# Altium PCB 1_SPDIF_PCB_V1x4.PcbDoc (part 1 of 2)
Units mm, origin at the board's own origin, x right, y up, seen from the top; angles counter-clockwise.
Board outline 60 x 60 mm, 4 copper layers (Top Layer, Mid-Top Layer, Mid-Bot Layer, Bottom Layer), stack 1.543 mm thick; 67 components, 68 nets, 241 pads, 109 vias.
Unrouted connection lines stored in the file: 1.
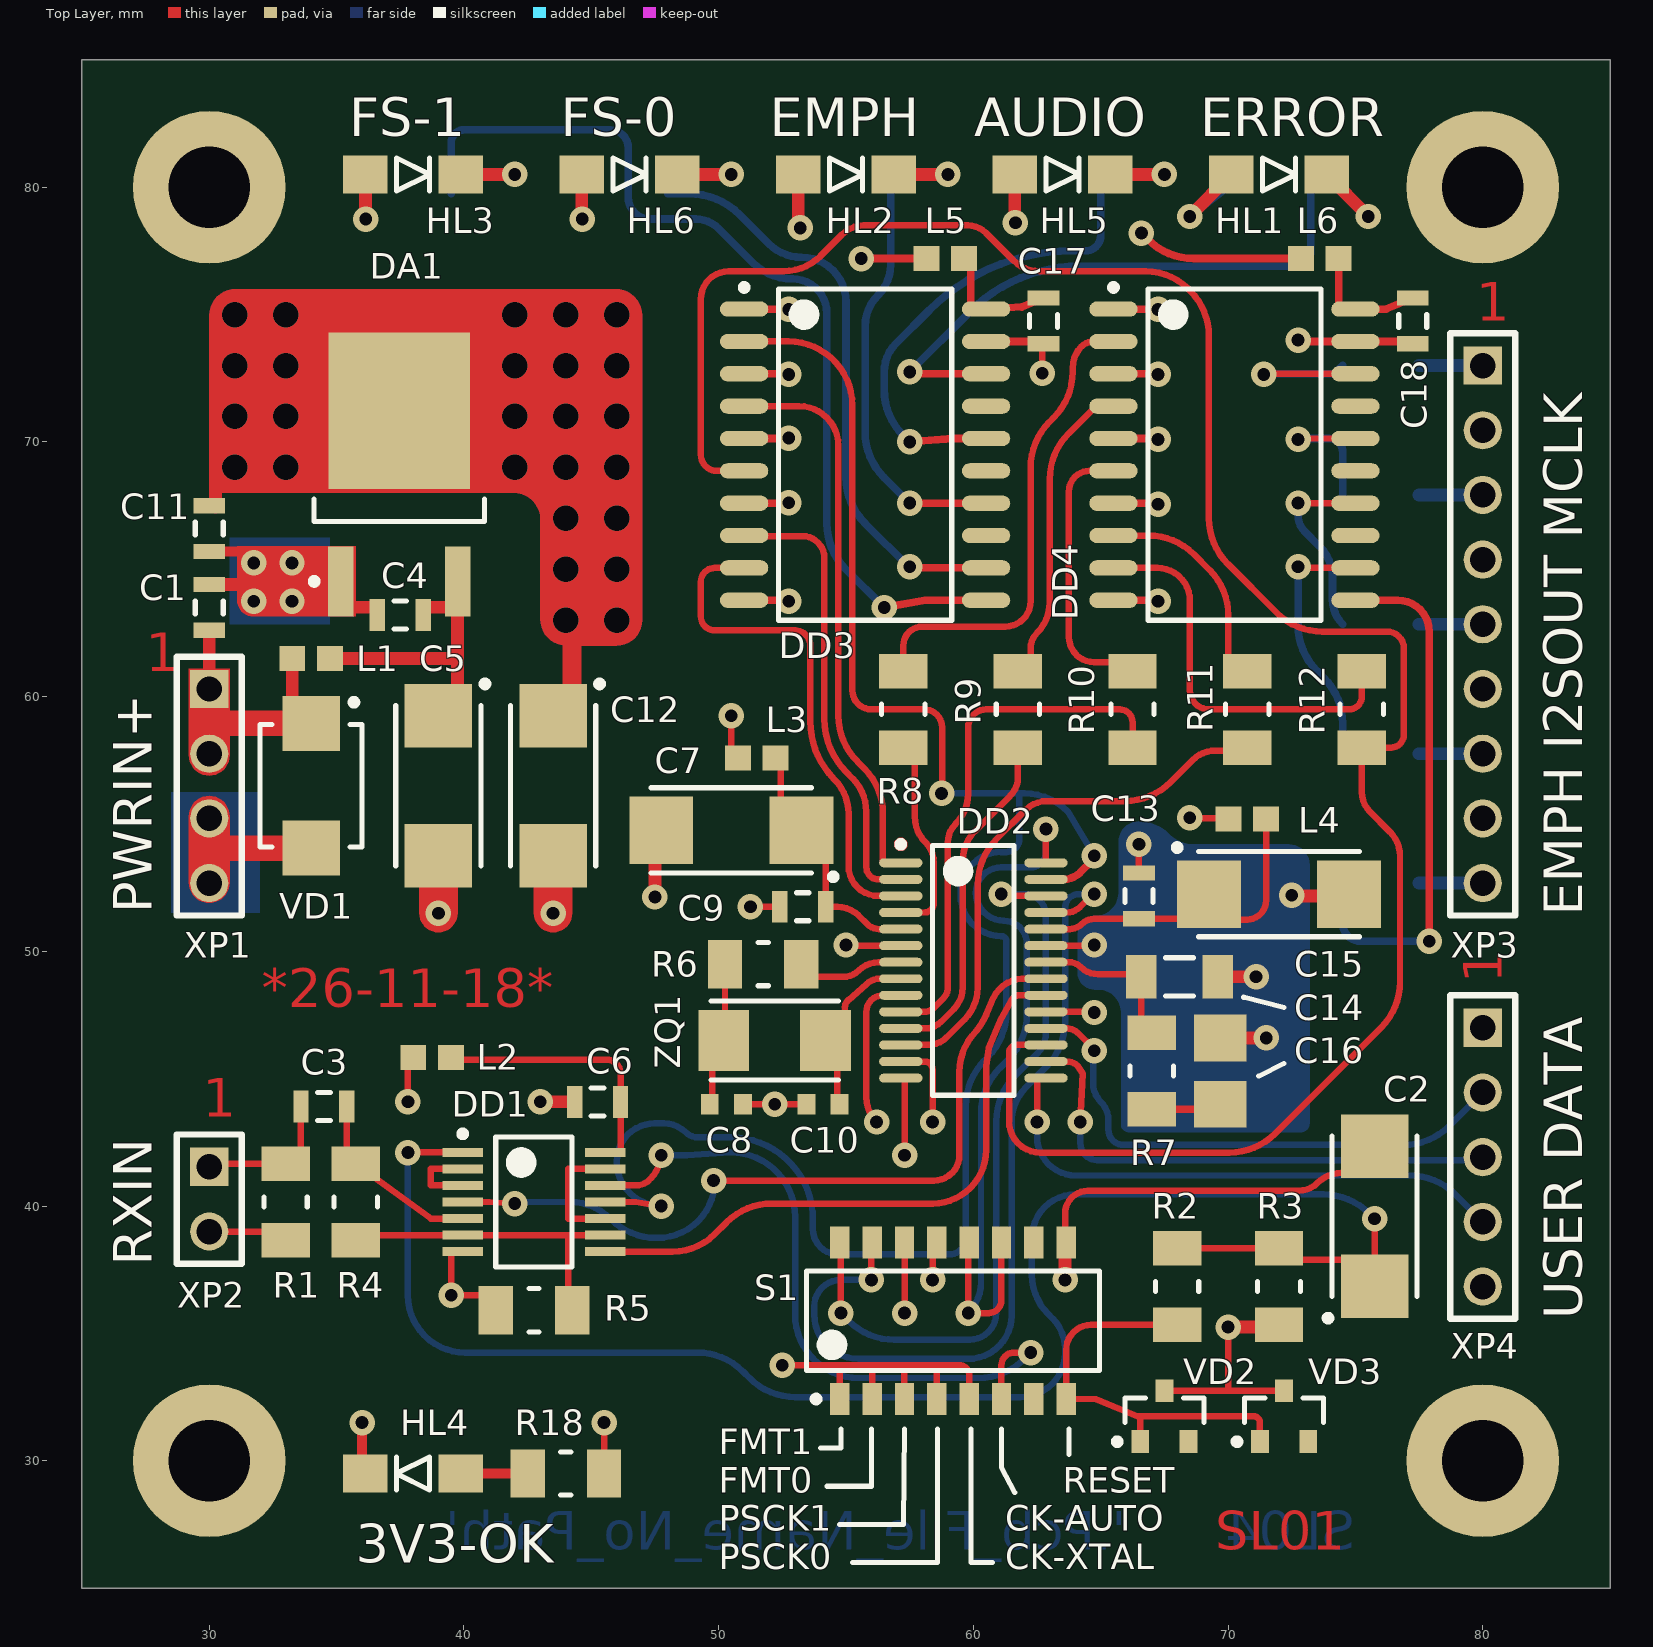
[diagram p0: Top Layer view]
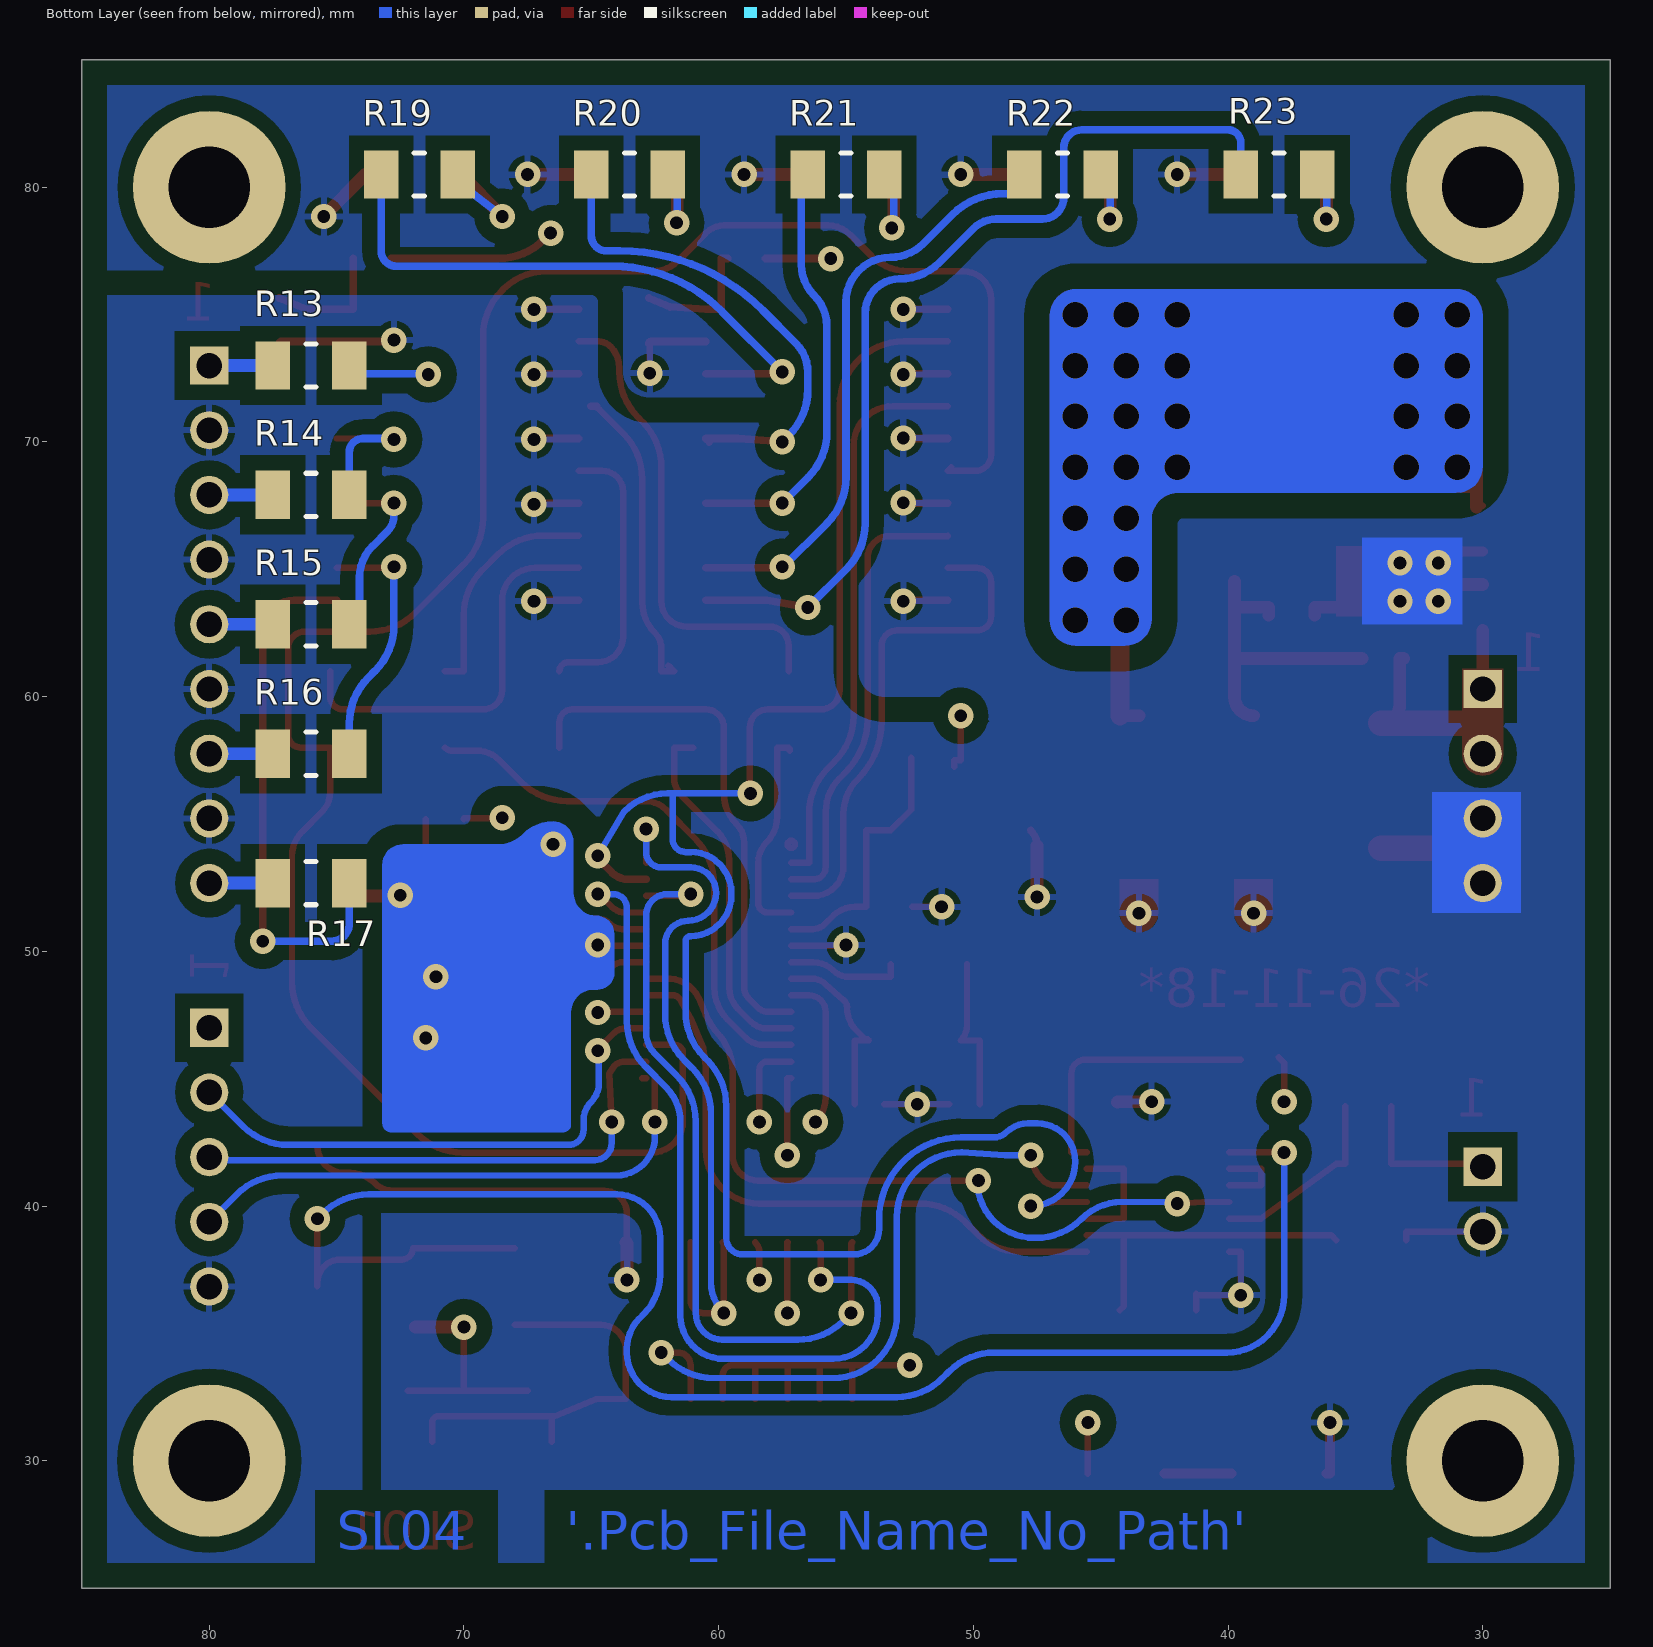
[diagram p1: Bottom Layer view, seen from below]
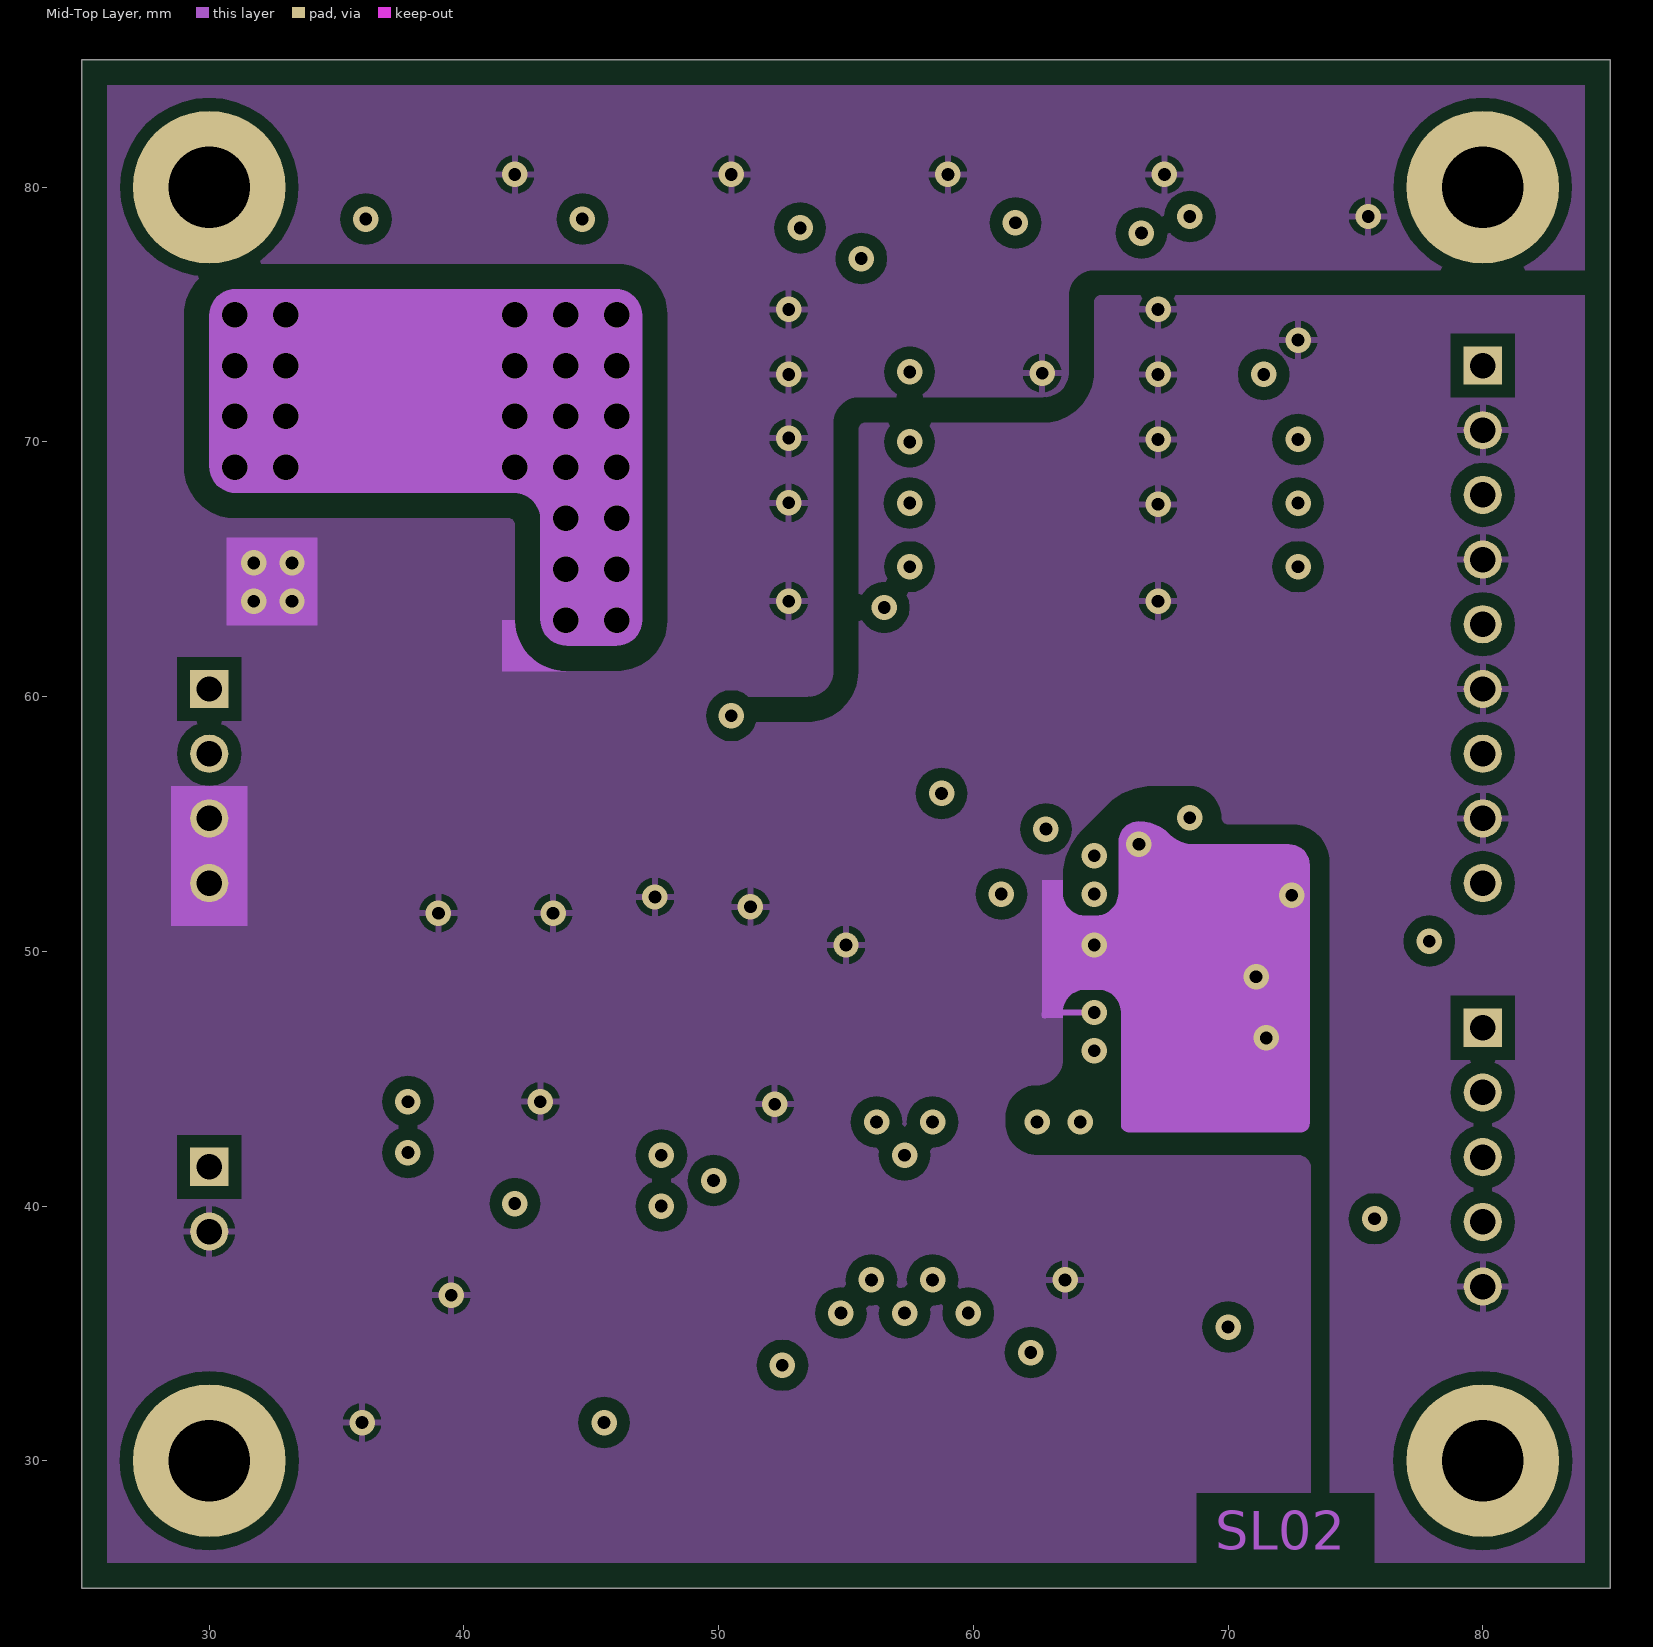
[diagram p2: Mid-Top Layer]
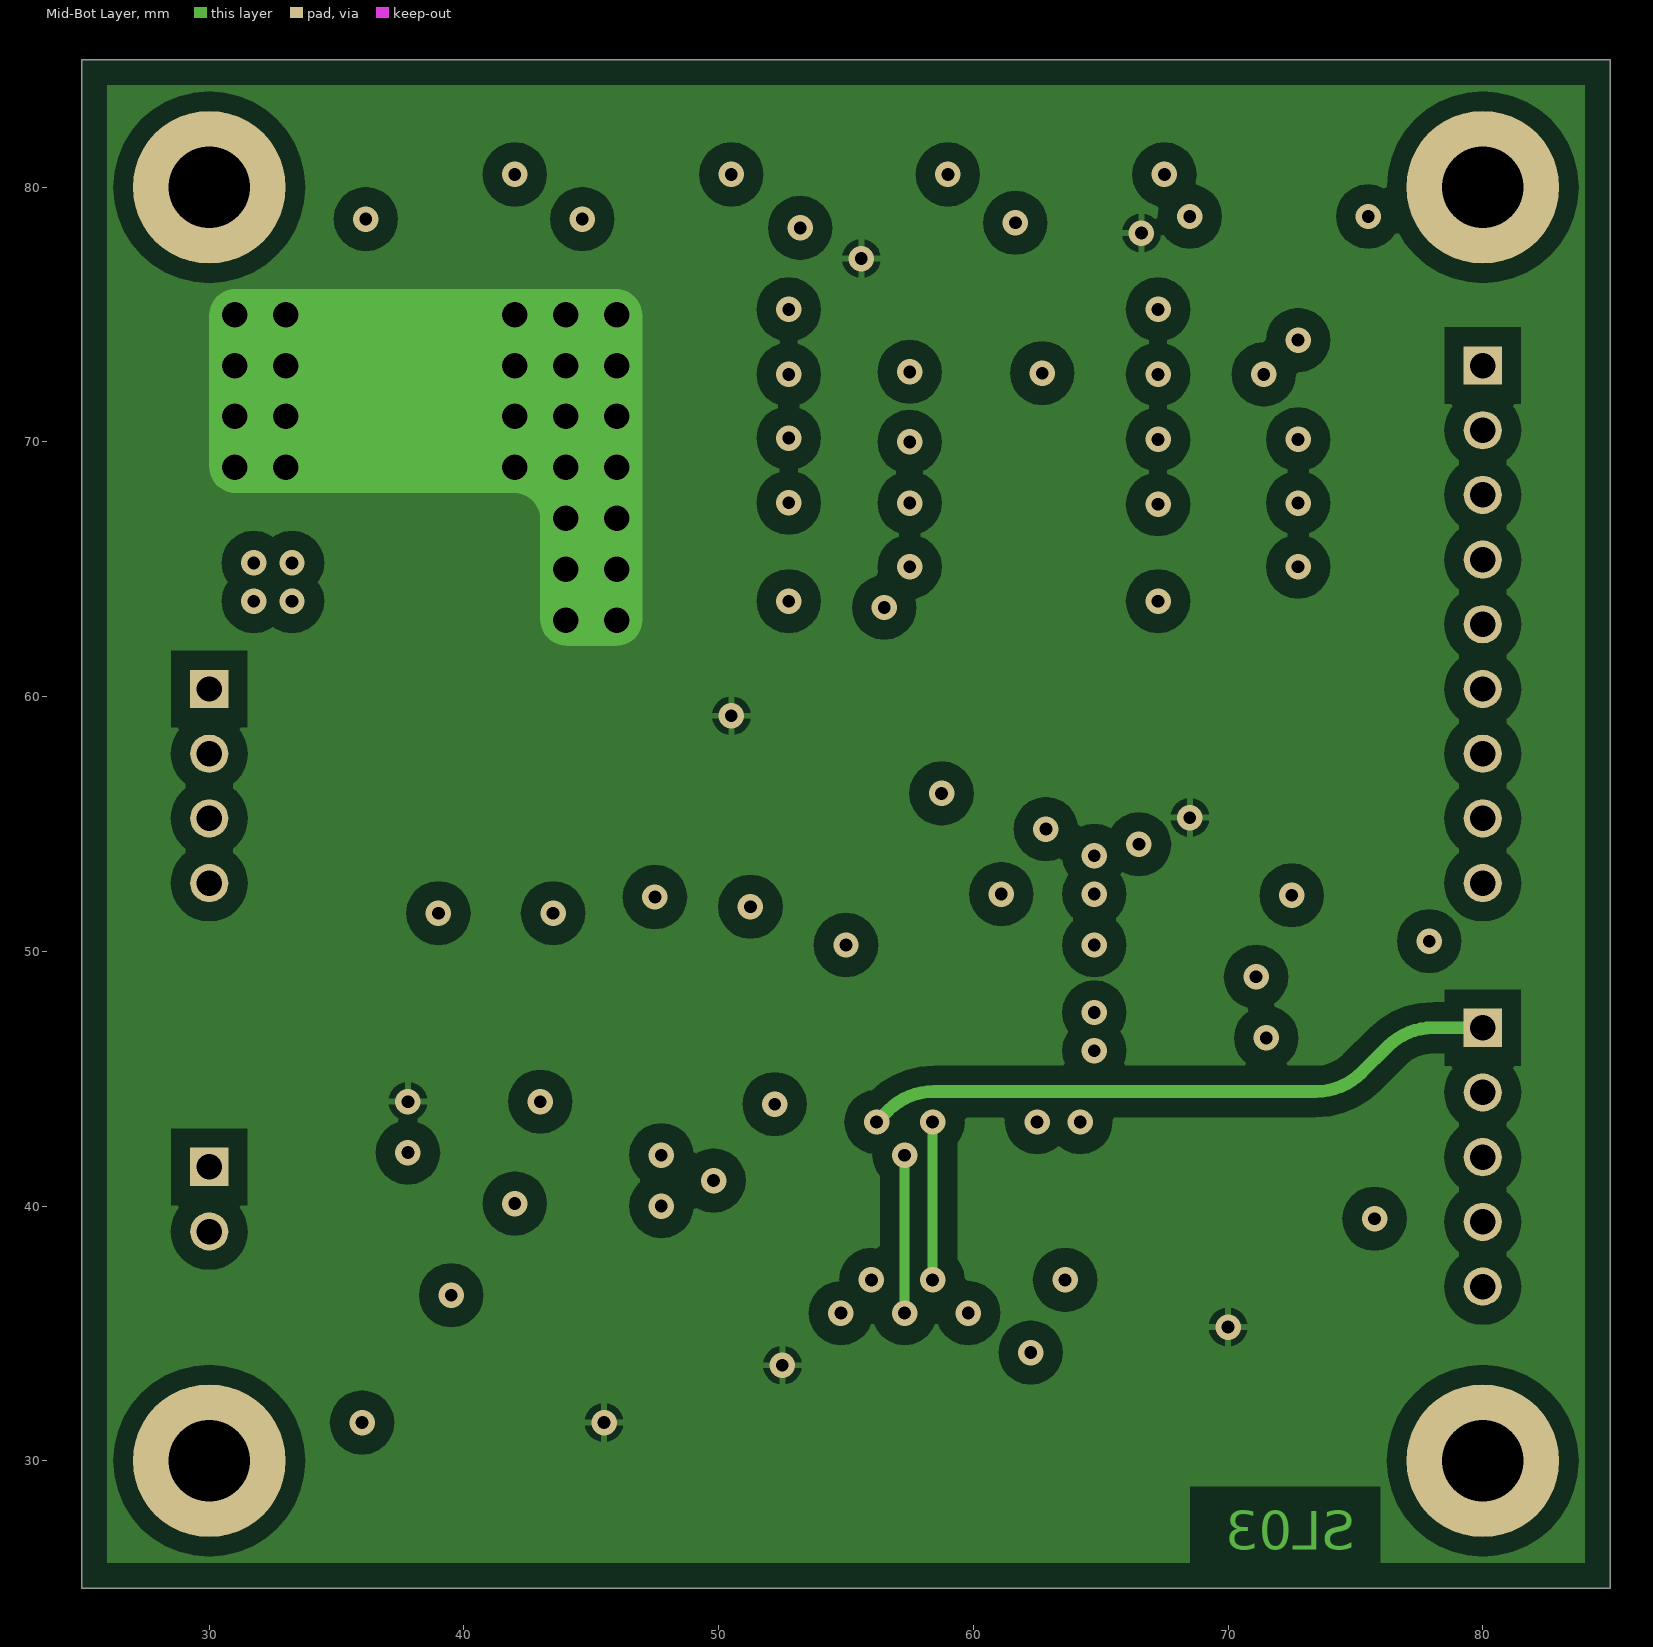
[diagram p3: Mid-Bot Layer]

## Layer stack, top to bottom
Top Solder: solder mask 0.0102, Solder Resist, Dk 3.5
Top Layer: signal copper 0.0356
Prepreg Top: prepreg 0.2, FR-4, Dk 4.2
Mid-Top Layer: signal copper 0.036
Core: core 1, Dk 4.2
Mid-Bot Layer: signal copper 0.036
Prepreg Bot: prepreg 0.2, Dk 4.2
Bottom Layer: signal copper 0.0356
Bottom Solder: solder mask 0.0102, Solder Resist, Dk 3.5

## Board outline
25,25 85,25 85,85 25,85

## Design rules (kind name [scope] priority, off if disabled: settings)
Clearance Clearance_MT_Poly [All vs (OnLayer('Mid-Top Layer') AND InPolygon)] p1: gap=0.5 ignorepadtopadclearanceinfootprint=FALSE
Clearance Clearance_Bot_Poly [All vs (OnLayer('Bottom Layer') AND InPolygon)] p2: gap=0.6 ignorepadtopadclearanceinfootprint=FALSE
Clearance Clearance_MB_Poly [All vs (OnLayer('Mid-Bot Layer') AND InPolygon)] p3: gap=0.75 ignorepadtopadclearanceinfootprint=FALSE
Clearance "Stitching No Net" [IsStitchingVia and InNet('No Net') vs (IsVia and (Not IsStitchingVia)) Or IsPad] p4: gap=0.254 ignorepadtopadclearanceinfootprint=FALSE
Clearance [All] p5: gap=0.254 ignorepadtopadclearanceinfootprint=FALSE except(0: Arc-Hole Track-Hole SMDPad-Hole THPad-Hole Via-Hole Fill-Hole Poly-Hole Region-Hole Text-Hole)
HoleSize [All] p1: absolutevalues=TRUE maxlimit=5 minlimit=0.025 maxpercent=80.000 minpercent=20.000
MinimumSolderMaskSliver [All] p1: minsoldermaskwidth=0.1
PolygonConnect [All] p1: connectstyle=Relief reliefconductorwidth=0.254 reliefentries=4 polygonreliefangle="90 Angle" airgapwidth=0.254
RoutingVias [All] p1: holewidth=0.5 width=1 viastyle="Through Hole" minholewidth=0.5 minwidth=0.9 maxholewidth=1 maxwidth=1.5
SilkToSilkClearance [All] p1: silktosilkclearance=0.2
SilkToSolderMaskClearance [IsPad] p1: minsilkscreentomaskgap=0.1 clearancetoexposedcopper=TRUE
SolderMaskExpansion [All] p1: expansion=0.07
Width [All] p1: maxlimit=1 minlimit=0.254 preferedwidth=0.5
26 further rules are at their usual default settings.

## Components (designator, comment, footprint, x,y, rotation, side; value= is the part's Value field where it differs from the comment)
C1 "Конденсатор" "GRM21B R1" 30,63.505 r270 top value=0.1u
C2 "Конд. полярный" К53-68-C 75.75,39.6 r90 top value=10u
C3 "Конденсатор" "GRM21B R1" 34.5,43.91 r0 top value=0.1u
C4 "Конденсатор" "GRM21B R1" 37.5,63.2 r0 top value=0.1u
C5 "Конд. полярный" К53-68-C 39,56.5 r270 top value=10u
C6 "Конденсатор" "GRM21B R1" 45.25,44.08 r180 top value=0.1u
C7 "Конд. полярный" К53-68-C 50.5,54.75 r180 top value=10u
C8 "Конденсатор" "GRM188 R1" 50.3,44 r180 top value=18p
C9 "Конденсатор" "GRM21B R1" 53.3,51.75 r180 top value=0.1u
C10 "Конденсатор" "GRM188 R1" 54.1,44 r0 top value=18p
C11 "Конденсатор" "GRM21B R1" 30,66.6 r90 top value=0.1u
C12 "Конд. полярный" К53-68-C 43.5,56.5 r270 top value=10u
C13 "Конденсатор" "GRM21B R1" 66.5,52.175 r90 top value=0.1u
C14 "Конденсатор" "GRM31C R1" 68.1,49 r180 top value=4700p
C15 "Конд. полярный" К53-68-C 72,52.25 r0 top value=10u
C16 "Конденсатор" "K10-79 3.2x1.6x1.6 N" 69.7,45.3 r270 top value=0.068u
C17 "Конденсатор" "GRM21B R1" 62.75,74.75 r270 top value=0.1u
C18 "Конденсатор" "GRM21B R1" 77.25,74.75 r270 top value=0.1u
DA1 "TLV1117-KVU" TO-252-TI-R1 37.46,68.725 r90 top locked
DD1 "74XX04" TSSOP-14-TI-R1 42.75,40.16 r0 top
DD2 "DIR9001PW" PW28_N 60,49.25 r0 top
DD3 "74XX541" "SOIC-20W IPC N (NXP)" 55.75,69.5 r0 top
DD4 "74XX541" "SOIC-20W IPC N (NXP)" 70.25,69.5 r0 top
HL1 "Светодиод" "LED KP-3216-R" 72,80.5 r0 top
HL2 "Светодиод" "LED KPT-3216-R" 55,80.5 r0 top
HL3 "Светодиод" "LED KPT-3216-R" 38,80.5 r0 top
HL4 "Светодиод" "LED KP-3216-R" 38,29.5 r180 top locked
HL5 "Светодиод" "LED KPT-3216-R" 63.5,80.5 r0 top
HL6 "Светодиод" "LED KPT-3216-R" 46.5,80.5 r0 top
L1 "Дроссель BLM" INDC1608X10N 34,61.5 r0 top value=n
L2 "Дроссель BLM" INDC1608X10N 38.75,45.835 r180 top value=n
L3 "Дроссель BLM" INDC1608X10N 51.5,57.6 r180 top value=n
L4 "Дроссель BLM" INDC1608X10N 70.75,55.19 r180 top value=n
L5 "Дроссель BLM" INDC1608X10N 58.9,77.2 r0 top value=n
L6 "Дроссель BLM" INDC1608X10N 73.6,77.2 r0 top value=n
R1 "Резистор" "IEC 2013N" 33,40.16 r90 top value=75
R2 "Резистор" "IEC 2013N" 68,36.84 r270 top value=470
R3 "Резистор" "IEC 2013N" 72,36.84 r270 top value=47k
R4 "Резистор" "IEC 2013N" 35.75,40.16 r270 top value=47k
R5 "Резистор" "IEC 2013N" 42.75,35.91 r0 top value=2.2k
R6 "Резистор" "IEC 2013N" 51.75,49.5 r0 top value=470
R7 "Резистор" "IEC 2013N" 67,45.3 r270 top value=680
R8 "Резистор" "IEC 2013N" 57.25,59.5 r90 top value=33
R9 "Резистор" "IEC 2013N" 61.75,59.5 r90 top value=33
R10 "Резистор" "IEC 2013N" 66.25,59.5 r90 top value=33
R11 "Резистор" "IEC 2013N" 70.75,59.5 r90 top value=33
R12 "Резистор" "IEC 2013N" 75.25,59.5 r90 top value=33
R13 "Резистор" "IEC 2013N" 76,73 r0 bottom value=33
R14 "Резистор" "IEC 2013N" 76,67.92 r0 bottom value=33
R15 "Резистор" "IEC 2013N" 76,62.84 r0 bottom value=33
R16 "Резистор" "IEC 2013N" 76,57.76 r0 bottom value=33
R17 "Резистор" "IEC 2013N" 76,52.68 r0 bottom value=33
R18 "Резистор" "IEC 2013N" 44,29.5 r180 top value=330
R19 "Резистор" "IEC 2013N" 71.75,80.5 r180 bottom value=330
R20 "Резистор" "IEC 2013N" 63.5,80.5 r180 bottom value=330
R21 "Резистор" "IEC 2013N" 55,80.5 r180 bottom value=330
R22 "Резистор" "IEC 2013N" 46.5,80.5 r180 bottom value=330
R23 "Резистор" "IEC 2013N" 38,80.5 r180 bottom value=330
S1 "NHDS08" "ПЕРЕКЛ. NHDS08" 59.2,35.5 r0 top
VD1 "Стабилитрон" SMBJ-LF-R1 34,56.5 r270 top
VD2 "BAT54" BAT54-VISHAY-R 67.5,31.75 r90 top
VD3 "BAT54" BAT54-VISHAY-R 72.2,31.75 r90 top
XP1 "X4 Connector XP" СНП346-4ВП21-1 30,60.3 r270 top
XP2 "X2 Connector XP" СНП346-2ВП21-1 30,41.54 r270 top
XP3 "X9 Connector XP" СНП346-9ВП21-1 80,73 r270 top
XP4 "X5 Connector XP" СНП346-5ВП21-1 80,47 r270 top
ZQ1 "Кварц 2к" "NX5032GA NDK" 52.2,46.5 r0 top

## Footprints (in the part's own frame and the unit in brackets; to place one, negate y for a bottom-side part, rotate by r counter-clockwise, add the part's x,y. Pads: shape width x height; smd on the part's side, far side on the other; paste and mask are expansions set on the pad)
BAT54-VISHAY-R [mm] "SOT-23-3 by Vishay, Footprint recommendation"
  rect 0.9x0.7 smd: 1(-1,0.95) 2(-1,-0.95) 3(1,0)
  silkscreen extent -1.12,-1.55 0.71,1.97, body extent -1.3,-1.55 1.3,1.55, height 1.15
"GRM21B R1" [mm]
  rect 0.6x1.25 smd mask+0.05: 1(-0.9,0) 2(0.9,0)
  silkscreen extent -0.25,-0.55 0.25,0.55, body extent -1,-0.63 1,0.63, height 1.35
"GRM31C R1" [mm]
  rect 1.2x1.7 smd mask+0.05: 1(-1.5,0) 2(1.5,0)
  silkscreen extent -0.55,-0.75 0.55,0.75, body extent -1.7,-0.9 1.7,0.9, height 1.8
"GRM188 R1" [mm]
  rect 0.7x0.8 smd mask+0.05: 1(-0.65,0) 2(0.65,0)
  body extent -0.85,-0.45 0.85,0.45, height 0.9
"IEC 2013N" [mm] "Резистор 1206 (метр. 3216) уровень 2. ТПМ # 2013N ГОСТ IEC 61188-5-2-2013"
  rect 1.35x1.9 smd: 1(-1.5,0) 2(1.5,0)
  silkscreen extent -0.2,-0.85 0.2,0.85, body extent -1.7,-0.87 1.7,0.87, height 0.65
INDC1608X10N [mm] "Chip Inductor, 2-Leads, Body 1,60x0,80mm, IPC Medium Density"
  rect 1.02x0.98 smd: 1(-0.74,0) 2(0.74,0)
  body extent -0.87,-0.48 0.87,0.47, height 0.95
"K10-79 3.2x1.6x1.6 N" [mm] "Конденсатор К10-79 3,2 х 1,6 х 1,6 мм, расчет ТПМ уровня 2 по ГОСТ 61188-5-2-2013"
  rect 1.83x2.06 smd: 1(-1.3,0) 2(1.3,0)
  body extent -1.8,-1 1.8,1, height 1.6
"LED KP-3216-R" [mm] "KP-3216 Chip LED, 2-Leads, Body 3,20x1,60mm, Recommended Soldering Pattern"
  rect 1.75x1.5 smd: 1(-1.875,0) 2(1.875,0)
  silkscreen extent -0.65,-0.65 0.65,0.65, body extent -1.6,-0.8 1.6,0.8, height 1.1
"LED KPT-3216-R" [mm] "KPT-3216 Chip LED, 2-Leads, Body 3,20x1,60mm, Recommended Soldering Pattern"
  rect 1.75x1.5 smd: 1(-1.875,0) 2(1.875,0)
  silkscreen extent -0.65,-0.65 0.65,0.65, body extent -1.6,-0.8 1.6,0.8, height 0.75
"NX5032GA NDK" [mm]
  rect 2x2.4 smd: 1(-2,0) 2(2,0)
  silkscreen extent -2.5,-1.55 2.5,1.55, body extent -2.5,-1.6 2.5,1.6, height 1.5
PW28_N [mm] "TSOP, 28-Leads, Body 9.7x4.4mm, Pitch 0.65mm, IPC Medium Density"
  oval 1.7x0.35 smd: 1(-2.85,4.225) 2(-2.85,3.575) 3(-2.85,2.925) 4(-2.85,2.275) 5(-2.85,1.625) 6(-2.85,0.975) 7(-2.85,0.325) 8(-2.85,-0.325) 9(-2.85,-0.975) 10(-2.85,-1.625) 11(-2.85,-2.275) 12(-2.85,-2.925) 13(-2.85,-3.575) 14(-2.85,-4.225) 15(2.85,-4.225) 16(2.85,-3.575) 17(2.85,-2.925) 18(2.85,-2.275) 19(2.85,-1.625) 20(2.85,-0.975) 21(2.85,-0.325) 22(2.85,0.325) 23(2.85,0.975) 24(2.85,1.625) 25(2.85,2.275) 26(2.85,2.925) 27(2.85,3.575) 28(2.85,4.225)
  silkscreen extent -2.97,-4.9 1.6,5.07, body extent -3.3,-4.9 3.3,4.9, height 1.2
SMBJ-LF-R1 [mm] "DO-214AA (SMB J-Bend) by Littelfuse, Polar"
  rect 2.16x2.26 smd: 1(-2.45,0) 2(2.45,0)
  silkscreen extent -3.4,-2 2.4,2, body extent -2.6,-1.97 2.6,1.97, height 2.61
"SOIC-20W IPC N (NXP)" [mm] "SOIC, 20-Leads, Body 12,80x7,50mm, Pitch 1,27mm, IPC Medium Density"
  oval 1.9x0.6 smd: 1(-4.75,5.715) 2(-4.75,4.445) 3(-4.75,3.175) 4(-4.75,1.905) 5(-4.75,0.635) 6(-4.75,-0.635) 7(-4.75,-1.905) 8(-4.75,-3.175) 9(-4.75,-4.445) 10(-4.75,-5.715) 11(4.75,-5.715) 12(4.75,-4.445) 13(4.75,-3.175) 14(4.75,-1.905) 15(4.75,-0.635) 16(4.75,0.635) 17(4.75,1.905) 18(4.75,3.175) 19(4.75,4.445) 20(4.75,5.715)
  silkscreen extent -4.87,-6.5 3.4,6.69, body extent -5.16,-6.5 5.16,6.5, height 2.65
TO-252-TI-R1 [mm] "D-PAK by Texas Instr. - TO-252 (KVU0003A) - 4218915/A (02/2017)"
  rect 2.75x1 smd mask+0.07: 1(-4.2,2.29) 3(-4.2,-2.29)
  rect 6.15x5.55 smd mask+0.07: 4(2.5,0)
  silkscreen extent -4.32,-3.35 -0.97,3.46, body extent -4.09,-3.35 5.81,3.35, height 2.52
TSSOP-14-TI-R1 [mm] "TSSOP-14 by Texas Instr - PW (R-PDSO-G14), Pattern - 4211284-2/G (08/15)"
  rect 1.6x0.35 smd mask+0.07: 1(-2.8,1.95) 2(-2.8,1.3) 3(-2.8,0.65) 4(-2.8,0) 5(-2.8,-0.65) 6(-2.8,-1.3) 7(-2.8,-1.95) 8(2.8,-1.95) 9(2.8,-1.3) 10(2.8,-0.65) 11(2.8,0) 12(2.8,0.65) 13(2.8,1.3) 14(2.8,1.95)
  silkscreen extent -2.92,-2.55 1.5,2.8, body extent -3.2,-2.55 3.2,2.55, height 1.2
К53-68-C [mm] "ТПМ #2063N по ГОСТ IEC 61188-5-2-13"
  rect 2.5x2.65 smd: 1(-2.75,0) 2(2.75,0)
  silkscreen extent -4.12,-1.68 3.15,1.95, body extent -3.15,-1.75 3.15,1.75, height 2.8
"ПЕРЕКЛ. NHDS08" [mm]
  rect 0.76x1.25 smd: 1(-4.445,-3.075) 2(-3.175,-3.075) 3(-1.905,-3.075) 4(-0.635,-3.075) 5(0.635,-3.075) 6(1.905,-3.075) 7(3.175,-3.075) 8(4.445,-3.075) 9(4.445,3.075) 10(3.175,3.075) 11(1.905,3.075) 12(0.635,3.075) 13(-0.635,3.075) 14(-1.905,3.075) 15(-3.175,3.075) 16(-4.445,3.075)
  silkscreen extent -5.75,-3.2 5.75,1.95, body extent -5.7,-3.35 5.7,3.35, height 1.55
СНП346-2ВП21-1 [mm] "Соединитель однорядный штыревой (вилка) на плату, прямой"
  rect 1.5x1.5 hole 1: 1(0,0)
  round 1.5 hole 1: 2(2.54,0)
  silkscreen extent -1.27,-1.27 3.81,1.27, body extent -1.27,-1.25 3.81,1.25, height 8.8
СНП346-4ВП21-1 [mm] "Соединитель однорядный штыревой (вилка) на плату, прямой"
  rect 1.5x1.5 hole 1: 1(0,0)
  round 1.5 hole 1: 2(2.54,0) 3(5.08,0) 4(7.62,0)
  silkscreen extent -1.27,-1.27 8.89,1.27, body extent -1.27,-1.25 8.89,1.25, height 8.8
СНП346-5ВП21-1 [mm] "Соединитель однорядный штыревой (вилка) на плату, прямой"
  rect 1.5x1.5 hole 1: 1(0,0)
  round 1.5 hole 1: 2(2.54,0) 3(5.08,0) 4(7.62,0) 5(10.16,0)
  silkscreen extent -1.27,-1.27 11.43,1.27, body extent -1.27,-1.25 11.43,1.25, height 8.8
СНП346-9ВП21-1 [mm] "Соединитель однорядный штыревой (вилка) на плату, прямой"
  rect 1.5x1.5 hole 1: 1(0,0)
  round 1.5 hole 1: 2(2.54,0) 3(5.08,0) 4(7.62,0) 5(10.16,0) 6(12.7,0) 7(15.24,0) 8(17.78,0) 9(20.32,0)
  silkscreen extent -1.27,-1.27 21.59,1.27, body extent -1.27,-1.25 21.59,1.25, height 8.8

## Part data
C1 C3 C4 C6 C9 C11 C13 C17 C18: library part 2000024, "0,1 мкФ ±10% X7R 50В 0805", Capacitance="0,1 мк", Dielectric=X7R, MaxVoltage="50 В", Part Number=GRM21BR71H104K, Tolerance=±10%, TU_Manufacturer="ф. Murata, Япония", BomSection="Прочие изделия", CompClass=Конденсатор, CompID=2000024, ComponentLink1Description="Описание серии", ComponentLink1URL="\\srv-4\AltiumBase$\Datasheets\Murata Chip Monolithic Ceramic Capacitors.pdf", CompSource=Покупное, DateStamp="06.11.2018 21:23:09", Full Name="Конденсатор GRM21BR71H104K ф. Murata, Япония", Group1=Постоянный, Mount=Поверхностный
C2 C5 C7 C12 C15: library part 2000510, "Танталовый, тип C", Capacitance="10 мк", MaxVoltage="16 B", Part Number="К53-68 \"C\"-16В-10 мкФ±10%", Tolerance=±10%, TU_Manufacturer="АЖЯР.673546.007 ТУ", BomSection="Прочие изделия", CompClass=Конденсатор, CompID=2000510, ComponentLink1Description=Описание, ComponentLink1URL="\\srv-4\AltiumBase$\Datasheets\Конденсатор К53-68 АЖЯР.673546.007 (Описание).pdf", ComponentLink2Description="Технические условия", ComponentLink2URL="\\srv-4\AltiumBase$\Datasheets\Конденсатор К53-68 АЖЯР.673546.007 ТУ.PDF", CompSource=Покупное, DateStamp="28.08.2017 13:55:04", Full Name="Конденсатор К53-68 \"C\"-16В-10 мкФ±10% АЖЯР.673546.007 ТУ", Grade=ВП, Group1=Постоянный, Mass=0,3, Mount=Поверхностный
C8 C10: library part 2000015, "18 пФ ±5% C0G 50В 0603", Capacitance="18 п", Dielectric=C0G, MaxVoltage="50 В", Part Number=GRM1885C1H180J, Tolerance=±5%, TU_Manufacturer="ф. Murata, Япония", BomSection="Прочие изделия", CompClass=Конденсатор, CompID=2000015, ComponentLink1Description="Описание серии", ComponentLink1URL="\\srv-4\AltiumBase$\Datasheets\Murata Chip Monolithic Ceramic Capacitors.pdf", CompSource=Покупное, DateStamp="27.02.2017 11:11:35", Full Name="Конденсатор GRM1885C1H180J ф. Murata, Япония", Group1=Постоянный, Mount=Поверхностный
C14: library part 2000029, "4700 пФ ±10% X7R 1кВ 1206", Capacitance="4700 п", Dielectric=X7R, MaxVoltage="1000 В", Part Number=GRM31BR73A472K, Tolerance=±10%, TU_Manufacturer="ф. Murata, Япония", BomSection="Прочие изделия", CompClass=Конденсатор, CompID=2000029, ComponentLink1Description="Описание серии", ComponentLink1URL="\\srv-4\AltiumBase$\Datasheets\Murata Chip Monolithic Ceramic Capacitors.pdf", CompSource=Покупное, DateStamp="27.02.2017 14:18:34", Full Name="Конденсатор GRM31BR73A472K ф. Murata, Япония", Group1=Постоянный, Mount=Поверхностный
C16: library part 2000346, "Чип-конденсатор 3.2 x 1.6 x 1.6 мм", Capacitance="0,068 мк", Dielectric=Н30, MaxVoltage="25 В", Part Number="К10-79-25В-0,068 мкФ±20%-Н30", Tolerance=±20%, TU_Manufacturer="АЖЯР.673511.004 ТУ", BomSection="Прочие изделия", CompClass=Конденсатор, CompID=2000346, ComponentLink1Description=Описание, ComponentLink1URL="\\srv-4\AltiumBase$\Datasheets\Конденсатор К10-79 АЖЯР.673511.004 (Описание).pdf", CompSource=Покупное, DateStamp="02.08.2017 14:55:35", Full Name="Конденсатор К10-79-25В-0,068 мкФ±20%-Н30 АЖЯР.673511.004 ТУ", Grade=ВП, Group1=Постоянный, Mass=0,15, Mount=Поверхностный
DA1: library part 6000109, "3,3V Fixed Low-Dropout Voltage Regulator, TO-252", Part Number=TLV1117-33IKVURG3, TU_Manufacturer="ф. Texas Instruments, США", Voltage="3,3 V", BomSection="Прочие изделия", CompClass=Микросхема, CompID=6000109, ComponentLink1Description=Datasheet, ComponentLink1URL="\\srv-4\AltiumBase$\Datasheets\Микросхема TLV1117 ф. Texas Instruments.pdf", CompSource=Покупное, DateStamp="03.11.2018 18:52:56", Full Name="Микросхема TLV1117-33IKVURG3 ф. Texas Instruments, США", Grade=Industrial, Group1=Стабилизатор, Mass=1, Mount=Поверхностный
DD1: library part 6000108, "Hex Inverters ( 6 x логическое \"НЕ\" ), TSSOP-14", Part Number=SN74LVC04APWR, TU_Manufacturer="ф. Texas Instruments, США", BomSection="Прочие изделия", CompClass=Микросхема, CompID=6000108, ComponentLink1Description="Лист данных", ComponentLink1URL="\\srv-4\AltiumBase$\Datasheets\Микросхемы SN54LVC04A, SN74LVC04A ф. Texas Instruments, США.pdf", CompSource=Покупное, DateStamp="02.11.2018 17:23:40", Full Name="Микросхема SN74LVC04APWR ф. Texas Instruments, США", Grade=Industrial, Group1="Логические элементы", Mass=1, Mount=Поверхностный
DD2: library part 6000002, "Конвертер интерфейса, 96 кГц, TSSOP-28", Part Number=DIR9001PWR, TU_Manufacturer="ф. Texas Instruments, США", BomSection="Прочие изделия", CompClass=Микросхема, CompID=6000002, ComponentLink1URL="\\srv-4\AltiumBase$\Datasheets\Микросхема DIR9001 ф. Texas Instruments.pdf", CompSource=Покупное, DateStamp="10.08.2018 11:17:46", Full Name="Микросхема DIR9001PWR ф. Texas Instruments, США", Grade=Automotive, Group1=Цифровая, Mount=Поверхностный
DD3 DD4: library part 6000101, "Octal buffer/line driver with 5 V tolerant inputs/outputs, 3 state, SO-20", Part Number=74LVC541AD, TU_Manufacturer="ф. NXP, Нидерланды", BomSection="Прочие изделия", CompClass=Микросхема, CompID=6000101, ComponentLink1Description="Лист данных", ComponentLink1URL="\\srv-4\AltiumBase$\Datasheets\Микросхема 74LVC541A ф. NXP, Нидерланды.pdf", CompSource=Покупное, DateStamp="29.10.2018 15:31:22", Full Name="Микросхема 74LVC541AD ф. NXP, Нидерланды", Grade=Industrial, Group1=Буфер, Mount=Поверхностный
HL1 HL4: library part 8000005, "Hyper Red (650 nm) smd chip led lamp, 3.2x1.6x1.1 mm", Part Number=KP-3216SURCK, TU_Manufacturer="ф. Kingbright, КНР", BomSection="Прочие изделия", CompClass=Светодиод, CompID=8000005, ComponentLink1Description=Datasheet, ComponentLink1URL="\\srv-4\AltiumBase$\Datasheets\Светодиод KP-3216SURCK ф. Kingbright, КНР.pdf", CompSource=Покупное, DateStamp="14.11.2018 15:22:17", Full Name="Светодиод KP-3216SURCK ф. Kingbright, КНР", Grade=Industrial, Group1="Видимого спектра - красный", Mass=1, Mount=Поверхностный
HL2 HL3 HL5 HL6: library part 8000007, "Super Bright Yellow (588 nm) smd chip led lamp, 3.2x1.6x0.75 mm", Part Number=KPT-3216SYC, TU_Manufacturer="ф. Kingbright, КНР", BomSection="Прочие изделия", CompClass=Светодиод, CompID=8000007, ComponentLink1Description=Datasheet, ComponentLink1URL="\\srv-4\AltiumBase$\Datasheets\Светодиод KPT-3216SYC ф. Kingbright, КНР.pdf", CompSource=Покупное, DateStamp="14.11.2018 15:18:38", Full Name="Светодиод KPT-3216SYC ф. Kingbright, КНР", Grade=Industrial, Group1="Видимого спектра - желтый", Mass=1, Mount=Поверхностный
L1 L2 L3 L4 L5 L6: library part 3000424, "Chip Ferrite Bead - 2000 mA, 220 Ohm (@100 MHz), SMD 0603", Inductance=н, MaxCurrent="2 A", Part Number=BLM18EG221SN1, TU_Manufacturer="ф. Murata, Япония", BomSection="Прочие изделия", CompClass=Дроссель, CompID=3000424, ComponentLink1Description=Datasheet, ComponentLink1URL="\\srv-4\AltiumBase$\Datasheets\Дроссель BLM18EGxxxx ф. Murata, Япония.pdf", CompSource=Покупное, DateStamp="13.11.2018 18:40:44", DCR=0.05, Full Name="Дроссель BLM18EG221SN1 ф. Murata, Япония", Grade=Industrial, Mass=1, Mount=Поверхностный
R1: library part 1001255, "Чип-резистор 1206", MaxPower="0,25 Вт", Part Number="Р1-12-0,25-75 Ом±5%-Т", Resistance=75, Tolerance=±5%, TU_Manufacturer="АЛЯР.434110.005 ТУ", BomSection="Прочие изделия", CompClass=Резистор, CompID=1001255, ComponentLink1Description=Описание, ComponentLink1URL="\\srv-4\AltiumBase$\Datasheets\Резистор Р1-12 АЛЯР.434110.005 ТУ.pdf", CompSource=Покупное, DateStamp="15.05.2017 16:59:21", Full Name="Резистор Р1-12-0,25-75 Ом±5%-Т АЛЯР.434110.005 ТУ", Grade=ВП, Group1=Постоянный, Mass=0,015, Mount=Поверхностный, TCR=Т
R2 R6: library part 1001274, "Чип-резистор 1206", MaxPower="0,25 Вт", Part Number="Р1-12-0,25-470 Ом±5%-Т", Resistance=470, Tolerance=±5%, TU_Manufacturer="АЛЯР.434110.005 ТУ", BomSection="Прочие изделия", CompClass=Резистор, CompID=1001274, ComponentLink1Description=Описание, ComponentLink1URL="\\srv-4\AltiumBase$\Datasheets\Резистор Р1-12 АЛЯР.434110.005 ТУ.pdf", CompSource=Покупное, DateStamp="15.05.2017 16:59:24", Full Name="Резистор Р1-12-0,25-470 Ом±5%-Т АЛЯР.434110.005 ТУ", Grade=ВП, Group1=Постоянный, Mass=0,015, Mount=Поверхностный, TCR=Т
R3 R4: library part 1001322, "Чип-резистор 1206", MaxPower="0,25 Вт", Part Number="Р1-12-0,25-47 кОм±5%-Т", Resistance="47 к", Tolerance=±5%, TU_Manufacturer="АЛЯР.434110.005 ТУ", BomSection="Прочие изделия", CompClass=Резистор, CompID=1001322, ComponentLink1Description=Описание, ComponentLink1URL="\\srv-4\AltiumBase$\Datasheets\Резистор Р1-12 АЛЯР.434110.005 ТУ.pdf", CompSource=Покупное, DateStamp="15.05.2017 16:59:34", Full Name="Резистор Р1-12-0,25-47 кОм±5%-Т АЛЯР.434110.005 ТУ", Grade=ВП, Group1=Постоянный, Mass=0,015, Mount=Поверхностный, TCR=Т
R5: library part 1001290, "Чип-резистор 1206", MaxPower="0,25 Вт", Part Number="Р1-12-0,25-2,2 кОм±5%-Т", Resistance="2,2 к", Tolerance=±5%, TU_Manufacturer="АЛЯР.434110.005 ТУ", BomSection="Прочие изделия", CompClass=Резистор, CompID=1001290, ComponentLink1Description=Описание, ComponentLink1URL="\\srv-4\AltiumBase$\Datasheets\Резистор Р1-12 АЛЯР.434110.005 ТУ.pdf", CompSource=Покупное, DateStamp="15.05.2017 16:59:27", Full Name="Резистор Р1-12-0,25-2,2 кОм±5%-Т АЛЯР.434110.005 ТУ", Grade=ВП, Group1=Постоянный, Mass=0,015, Mount=Поверхностный, TCR=Т
R7: library part 1001278, "Чип-резистор 1206", MaxPower="0,25 Вт", Part Number="Р1-12-0,25-680 Ом±5%-Т", Resistance=680, Tolerance=±5%, TU_Manufacturer="АЛЯР.434110.005 ТУ", BomSection="Прочие изделия", CompClass=Резистор, CompID=1001278, ComponentLink1Description=Описание, ComponentLink1URL="\\srv-4\AltiumBase$\Datasheets\Резистор Р1-12 АЛЯР.434110.005 ТУ.pdf", CompSource=Покупное, DateStamp="15.05.2017 16:59:25", Full Name="Резистор Р1-12-0,25-680 Ом±5%-Т АЛЯР.434110.005 ТУ", Grade=ВП, Group1=Постоянный, Mass=0,015, Mount=Поверхностный, TCR=Т
R8 R9 R10 R11 R12 R13 R14 R15 R16 R17: library part 1001246, "Чип-резистор 1206", MaxPower="0,25 Вт", Part Number="Р1-12-0,25-33 Ом±5%-Т", Resistance=33, Tolerance=±5%, TU_Manufacturer="АЛЯР.434110.005 ТУ", BomSection="Прочие изделия", CompClass=Резистор, CompID=1001246, ComponentLink1Description=Описание, ComponentLink1URL="\\srv-4\AltiumBase$\Datasheets\Резистор Р1-12 АЛЯР.434110.005 ТУ.pdf", CompSource=Покупное, DateStamp="15.05.2017 16:59:19", Full Name="Резистор Р1-12-0,25-33 Ом±5%-Т АЛЯР.434110.005 ТУ", Grade=ВП, Group1=Постоянный, Mass=0,015, Mount=Поверхностный, TCR=Т
R18 R19 R20 R21 R22 R23: library part 1001270, "Чип-резистор 1206", MaxPower="0,25 Вт", Part Number="Р1-12-0,25-330 Ом±5%-Т", Resistance=330, Tolerance=±5%, TU_Manufacturer="АЛЯР.434110.005 ТУ", BomSection="Прочие изделия", CompClass=Резистор, CompID=1001270, ComponentLink1Description=Описание, ComponentLink1URL="\\srv-4\AltiumBase$\Datasheets\Резистор Р1-12 АЛЯР.434110.005 ТУ.pdf", CompSource=Покупное, DateStamp="15.05.2017 16:59:23", Full Name="Резистор Р1-12-0,25-330 Ом±5%-Т АЛЯР.434110.005 ТУ", Grade=ВП, Group1=Постоянный, Mass=0,015, Mount=Поверхностный, TCR=Т
S1: library part 7000001, "Surface mount dip switch with tape seal option, 24VDC, 25mA", TU_Manufacturer="ф. Apem, США", BomSection="Прочие изделия", CompClass=Переключатель, CompID=7000001, ComponentLink1Description=Datasheet, ComponentLink1URL="\\srv-4\AltiumBase$\Datasheets\Микропереключатель NHDS-08 ф. APEM, США.pdf", CompSource=Покупное, DateStamp="14.11.2018 16:37:12", Full Name="Переключатель NHDS08 ф. Apem, США", Grade=Industrial, Mass=1, Mount=Поверхностный, Part Number=NHDS08, Высота="1.5 мм", Производитель="ф. Apem", Страна происхождения=Великобритания
VD1: library part 4000045, "TVS Diode, Uni-directional, 12V, DO-214AA (SMB J-Bend)", Part Number=SMBJ12A, TU_Manufacturer="ф. Littelfuse, США", BomSection="Прочие изделия", CompClass=Диод, CompID=4000045, ComponentLink1Description="Описание серии", ComponentLink1URL="\\srv-4\AltiumBase$\Datasheets\Диоды защитные SMBJ ф. Littelfuse, США.pdf", CompSource=Покупное, DateStamp="20.11.2018 17:38:45", Full Name="Диод SMBJ12A ф. Littelfuse, США", Grade=Military, Group1="Диод защитный", Mass=0.093, Mount=Поверхностный
VD2 VD3: library part 4000031, "Single Small Signal Schottky Diode, SOT-23-3", TU_Manufacturer="ф. Vishay, США", BomSection="Прочие изделия", CompClass=Диод, CompID=4000031, ComponentLink1Description="Описание серии", ComponentLink1URL="\\srv-4\AltiumBase$\Datasheets\Диоды BAT54 ф. Vishay, США.pdf", CompSource=Покупное, DateStamp="15.11.2018 13:02:51", Full Name="Диод BAT54 ф. Vishay, США", Grade=Automotive, Mass=0.0088, Mount=Поверхностный, Part Number=BAT54
XP1: library part 7000008, "Вилка СНП346 однорядная, прямая, 4 контакта", Part Number=СНП346-4ВП21-1-В, TU_Manufacturer="РЮМК.430420.011 ТУ", BomSection="Прочие изделия", CompClass=Соединитель, CompID=7000008, ComponentLink1Description="Технические условия", ComponentLink1URL="\\srv-4\AltiumBase$\Datasheets\Соединители типа СНП346 РЮМК.430420.011ТУ.PDF", CompSource=Покупное, DateStamp="06.11.2018 13:50:24", Full Name="Соединитель СНП346-4ВП21-1-В РЮМК.430420.011 ТУ", Grade=ВП, Group1=Вилка, Mass=0,24, Mount=Штырьевой, Назначение="\"ПИТАНИЕ\""
XP2: library part 7000006, "Вилка СНП346 однорядная, прямая, 2 контакта", Part Number=СНП346-2ВП21-1-В, TU_Manufacturer="РЮМК.430420.011 ТУ", BomSection="Прочие изделия", CompClass=Соединитель, CompID=7000006, ComponentLink1Description="Технические условия", ComponentLink1URL="\\srv-4\AltiumBase$\Datasheets\Соединители типа СНП346 РЮМК.430420.011ТУ.PDF", CompSource=Покупное, DateStamp="06.11.2018 13:48:31", Full Name="Соединитель СНП346-2ВП21-1-В РЮМК.430420.011 ТУ", Grade=ВП, Group1=Вилка, Mass=0,12, Mount=Штырьевой, Назначение="\"S/PDIF\""
XP3: library part 7000013, "Вилка СНП346 однорядная, прямая, 9 контактов", Part Number=СНП346-9ВП21-1-В, TU_Manufacturer="РЮМК.430420.011 ТУ", BomSection="Прочие изделия", CompClass=Соединитель, CompID=7000013, ComponentLink1Description="Технические условия", ComponentLink1URL="\\srv-4\AltiumBase$\Datasheets\Соединители типа СНП346 РЮМК.430420.011ТУ.PDF", CompSource=Покупное, DateStamp="06.11.2018 13:54:59", Full Name="Соединитель СНП346-9ВП21-1-В РЮМК.430420.011 ТУ", Grade=ВП, Group1=Вилка, Mass=0,54, Mount=Штырьевой, Назначение="\"I2S-OUTPUT\""
XP4: library part 7000009, "Вилка СНП346 однорядная, прямая, 5 контактов", Part Number=СНП346-5ВП21-1-В, TU_Manufacturer="РЮМК.430420.011 ТУ", BomSection="Прочие изделия", CompClass=Соединитель, CompID=7000009, ComponentLink1Description="Технические условия", ComponentLink1URL="\\srv-4\AltiumBase$\Datasheets\Соединители типа СНП346 РЮМК.430420.011ТУ.PDF", CompSource=Покупное, DateStamp="06.11.2018 13:52:08", Full Name="Соединитель СНП346-5ВП21-1-В РЮМК.430420.011 ТУ", Grade=ВП, Group1=Вилка, Mass=0,3, Mount=Штырьевой, Назначение="\"UDATA-OUT\""
ZQ1: library part 9000042, "Резонатор кварцевый 24,576 МГц, SMD", Part Number=NX5032GA-24.576M-STD-CSK-4, TU_Manufacturer="ф. NDK, Япония", BomSection="Прочие изделия", CompClass="Резонатор кварцевый", CompID=9000042, ComponentLink1Description=Datasheet, ComponentLink1URL="\\srv-4\AltiumBase$\Datasheets\Резонатор кварцевый NX5032GA ф. NDK, Япония (STD-CSK-3,4,7,8).pdf.pdf", CompSource=Покупное, DateStamp="08.11.2018 15:35:16", Full Name="Резонатор кварцевый NX5032GA-24.576M-STD-CSK-4 ф. NDK, Япония", Grade=Commercial, Mass=1, Mount=Поверхностный, Частота="24,576 МГц"

## Free pads (board coordinates)
  round 6 hole 3.2: S(30,30) S(30,80) S(80,30) S(80,80)

## Via types
v1: diameter 1, hole 0.5, Top Layer to Bottom Layer, 83 vias
v2: diameter 1, hole 1, Top Layer to Bottom Layer, 26 vias

## Nets (pads, with @x,y where several pads share a name; then routed paths per layer and width w, separated by ;. In a path a pad name is that pad's centre, name@x,y a point inside that pad or via, vN(x,y) a via of type N, cw(c..) or ccw(c..) an arc to the next point about the centre after c; other vN are vias at no path point)
3V3: C11.2 C12.1 DA1.4 L2.2 L3.2 L4.2 L5.1 L6.1 R3.2 R18.1 S1.1 S1.2 S1.3 S1.4 S1.5 VD2.3 VD3.3 | length 45.7
  Top Layer w0.254: C11.2 30.2,67.5 cw(c30.2,67.45) C11.2@30.25,67.45 ; v1(37.8,44.1) 37.8,45.625 L2.2 ; R18.1 v1(45.5,31.5) ; v1(50.5,59.25) 50.5,57.5 50.75,57.5 L3.2@50.75,57.25 ; v1(52.5,33.75) 54.755,33.75 ; S1.1 54.755,33.75 ; S1.2 56.025,33.725 ccw(c56,33.725) 56,33.75 ; S1.3 57.295,33.75 ; S1.4 58.565,33.685 ccw(c58.5,33.685) 58.5,33.75 ; S1.5 59.835,33.365 ccw(c59.45,33.365) 59.45,33.75 58.5,33.75 ; VD2.3 70,32.75 ; v1@68.5,55.22 69.98,55.22 cw(c69.98,55.19) L4.2 ; v1@70.01,35.25 ccw(c70.034,35.226) 70,35.226 70,32.75 ; R3.2@71.91,35.25 R3.2@72,35.16 ; VD3.3 70,32.75 ; 54.755,33.75 56,33.75 ; 56,33.75 57.295,33.75 ; 57.295,33.75 58.5,33.75
  Top Layer w0.3: v1(55.6,77.2) L5.1 ; v1(66.6,78.2) 66.856,77.944 ccw(c68.652,79.74) 68.652,77.2 L6.1
  Top Layer w0.5: C11.2@30.25,67.45 30.25,68.271 ; C12.1 C12.1@44.25,59.25 ; v2(44,63) v2@44.25,63 ; v1@70.01,35.25 R3.2@71.91,35.25
  Top Layer w0.75: C12.1@44.25,59.25 v2@44.25,63
  other v1: 70,35.25 68.5,55.25
  other v2: 46,63 44,65 46,65 44,67 46,67 31,69 33,69 42,69 44,69 46,69 31,71 33,71 42,71 44,71 46,71 31,73 33,73 42,73 44,73 46,73 31,75 33,75 42,75 44,75 46,75
3V3A: C7.1 C9.1 DD2.5 L3.1 | length 10.4
  Top Layer w0.254: L3.1@52.44,57.6 52.44,55.56 C7.1 54.2,54.75 C9.1 54.655,51.75 cw(c54.655,50.555) 55.5,51.4 55.829,51.071 ccw(c56.302,51.543) 56.302,50.875 DD2.5
3V3B: C13.1 C15.1 DD2.24 L4.1 | length 12.4
  Top Layer w0.254: DD2.24 63.778,50.875 ccw(c63.778,51.543) 64.25,51.071 cw(c64.743,50.578) 64.743,51.275 C13.1 69,51.275 ccw(c69.025,51.275) 69.025,51.25 70.75,51.25 ccw(c70.75,51.99) 71.49,51.99 L4.1
AUDIO: DD2.1 DD3.4 | length 22.2
  Top Layer w0.254: DD3.4 53.15,71.405 cw(c53.15,69.855) 54.7,69.855 54.7,59.252 ccw(c57.24,59.252) 55.444,57.456 55.706,57.194 cw(c53.91,55.398) 56.45,55.398 56.45,53.475 DD2.1
BCKO: DD2.11 R9.1 | length 14.3
  Top Layer w0.254: DD2.11 58.1,46.975 ccw(c58.1,47.88) 58.74,47.24 59.231,47.731 ccw(c58.372,48.59) 59.587,48.59 59.587,53.587 cw(c61.174,53.587) 60.051,54.709 61.445,56.102 ccw(c60.709,56.839) 61.75,56.839 R9.1 R9.1@61,58
BCKO#: R14.2 XP3.3 | length 2.5
  Bottom Layer w0.5: R14.2 XP3.3
BFR: DD2.18 XP4.2 | length 21.3
  Top Layer w0.254: DD2.18 63.678,46.975 cw(c63.678,46.378) 64.1,46.8 v1@64.715,46.185 ; v1@64.715,46.185 cw(c64.629,46.1) v1(64.75,46.1)
  Bottom Layer w0.254: v1(64.75,46.1) ccw(c64.871,45.979) 64.7,45.979 64.7,44.824 ccw(c65.724,44.824) 65,44.1 cw(c64.276,43.376) 65.3,43.376 65.3,43 ccw(c65.9,43) 65.9,42.4 76.888,42.4 ccw(c76.888,44.94) 78.684,43.144 XP4.2
CKSEL: DD2.28 S1.11 S1.12 | length 30.8
  Top Layer w0.254: S1.12 ccw(c59.92,38.49) 59.8,38.49 v1(59.8,35.8) 60.6,35.8 ccw(c60.6,36.3) 61.1,36.3 61.1,38.575 S1.11 ; DD2.28 v1(62.85,54.8)
  Bottom Layer w0.254: v1(59.8,35.8) ccw(c58.593,37.007) 60.3,37.007 60.3,43.627 cw(c62.84,43.627) 61.044,45.423 61.356,45.735 ccw(c59.56,47.531) 62.1,47.531 62.1,50.3 ccw(c61.2,50.3) 61.2,51.2 cw(c61.2,52.3) 60.1,52.3 cw(c61.1,52.3) 61.1,53.3 62.25,53.3 ccw(c62.25,53.9) 62.85,53.9 v1(62.85,54.8)
CLKST: DD2.9 XP4.1 | length 31.2
  Top Layer w0.254: v1(56.2,43.3) cw(c57.166,44.266) 55.8,44.266 55.8,47.625 cw(c56.45,47.625) 56.45,48.275 DD2.9
  Mid-Bot Layer w0.5: v1(56.2,43.3) 56.656,43.756 cw(c58.452,41.96) 58.452,44.5 73.448,44.5 ccw(c73.448,47.04) 75.244,45.244 76.256,46.256 cw(c78.052,44.46) 78.052,47 XP4.1
COUT: DD2.15 XP4.4 | length 21.5
  Top Layer w0.254: v1@62.5,43.275 v1(62.5,43.3) DD2.15@62.5,45 ; DD2.15 DD2.15@63,45.025
  Bottom Layer w0.254: v1(62.5,43.3) 62.5,42.732 ccw(c64.032,42.732) 64.032,41.2 77.128,41.2 cw(c77.128,38.66) 78.924,40.456 XP4.4
DOUT: DD2.12 R11.1 | length 21.4
  Top Layer w0.254: DD2.12 58.225,46.325 ccw(c58.225,47.362) 58.958,46.629 59.646,47.316 ccw(c58.372,48.59) 60.173,48.59 60.173,52.621 cw(c62.713,52.621) 60.917,54.417 62.046,55.546 ; 62.047,55.547 cw(c62.9,54.693) 62.9,55.9 65.948,55.9 ccw(c65.948,58.44) 67.744,56.644 68.611,57.511 cw(c69.5,56.622) 69.5,57.879 70.459,57.879 ccw(c70.459,58.291) R11.1
DOUT#: R16.2 XP3.7 | length 2.5
  Bottom Layer w0.5: R16.2 XP3.7
EMPH: DD2.17 DD3.6 R12.1 | length 87.6
  Top Layer w0.254: DD3.6@50.865,69 DD3.6 49.935,68.865 cw(c49.935,69.5) 49.3,69.5 49.3,75.6 cw(c50.4,75.6) 50.4,76.7 52.551,76.7 ccw(c52.551,78.749) 54,77.3 54.842,78.142 cw(c55.706,77.278) 55.706,78.5 59.776,78.5 cw(c59.776,77.476) 60.5,78.2 61.576,77.124 ccw(c62.6,78.149) 62.6,76.7 66.762,76.7 cw(c66.762,74.314) 68.449,76.001 68.506,75.944 cw(c66.71,74.148) 69.25,74.148 69.25,67.002 ccw(c71.79,67.002) 69.994,65.206 71.906,63.294 ccw(c73.702,65.09) 73.702,62.55 76.25,62.55 cw(c76.25,61.9) 76.9,61.9 76.9,58.5 cw(c76.4,58.5) 76.4,58 R12.1 75.25,56.25 ccw(c76.336,56.25) 75.568,55.482 76.361,54.689 cw(c75.422,53.75) 76.75,53.75 76.75,48.802 cw(c74.21,48.802) 76.006,47.006 71.844,42.844 cw(c70.048,44.64) 70.048,42.1 62.635,42.1 cw(c62.635,43.335) 61.4,43.335 61.4,46 cw(c61.725,46) 61.725,46.325 DD2.17
EMPH#: R17.2 XP3.9 | length 2.5
  Bottom Layer w0.5: R17.2 XP3.9
ERROR: DD1.11 DD2.27 DD3.2 | length 76.4
  Top Layer w0.254: DD1.11 46.75,40.16 v1(47.75,40) ; DD3.2 52.737,73.945 cw(c52.737,71.432) 55.25,71.432 55.25,60.25 ccw(c56,60.25) 56,59.5 58.07,59.5 cw(c58.07,58.8) 58.77,58.8 v1@58.77,56.2
  Top Layer w0.3: DD2.27 63.536,52.825 ccw(c63.536,53.764) 64.2,53.1 64.679,53.579 ccw(c64.509,53.75) v1(64.75,53.75)
  Bottom Layer w0.254: v1(47.75,40) cw(c47.75,41.75) 46,41.75 cw(c47.5,41.75) 47.5,43.25 47.855,43.25 cw(c47.855,42.055) 48.7,42.9 ccw(c49.183,43.383) 49.183,42.7 50.473,42.7 cw(c50.473,39.473) 53.7,39.473 53.7,39.1 ccw(c54.7,39.1) 54.7,38.1 59.05,38.1 ccw(c59.05,38.75) 59.7,38.75 59.7,43.927 cw(c62.24,43.927) 60.444,45.723 60.556,45.835 ccw(c58.76,47.631) 61.3,47.631 61.3,50.4 ccw(c61.1,50.4) 61.1,50.6 cw(c61.1,52.2) 59.5,52.2 59.5,52.3 cw(c61.1,52.3) 61.1,53.9 61.3,53.9 ccw(c61.3,54.4) 61.8,54.4 61.8,56.2 ; v1@58.77,56.2 61.8,56.2 ; v1(64.75,53.75) 63.707,55.493 ccw(c62,53.786) 62,56.2 61.8,56.2
  other v1: 58.75,56.2
FMT0: DD2.25 S1.15 | length 34.7
  Top Layer w0.254: v1(56,37.1) 56,38.515 cw(c56.085,38.515) S1.15 ; DD2.25 63.657,51.525 ccw(c63.657,52.293) 64.2,51.75 64.665,52.215 cw(c64.75,52.129) v1(64.75,52.25)
  Bottom Layer w0.254: v1(56,37.1) 54.8,37.1 ccw(c54.8,36.05) 53.75,36.05 53.75,35.75 ccw(c55.5,35.75) 55.5,34 59.8,34 ccw(c59.8,35.7) 61.5,35.7 61.5,43.3 cw(c63.431,43.3) 62.066,44.666 62.856,45.456 ccw(c61.06,47.252) 63.6,47.252 63.6,51.7 cw(c64.15,51.7) 64.15,52.25 v1(64.75,52.25)
FMT1: DD2.26 S1.16 | length 30.2
  Top Layer w0.254: S1.16 cw(c54.646,38.466) 54.8,38.466 v1(54.8,35.8) ; v1@61,52.25 ccw(c61.181,52.431) 61.181,52.175 DD2.26
  Bottom Layer w0.254: v1(54.8,35.8) 55.106,35.494 ccw(c56.902,37.29) 56.902,34.75 59.85,34.75 ccw(c59.85,35.8) 60.9,35.8 60.9,43.327 cw(c63.44,43.327) 61.644,45.123 62.5,45.979 ccw(c61.655,46.824) 62.85,46.824 62.85,51.396 ccw(c61.996,51.396) 61.996,52.25 v1(61.1,52.25)
FSOUT0: DD2.2 DD3.8 | length 17.9
  Top Layer w0.254: DD3.8 ccw(c51.025,66.325) 51.025,66.3 53.3,66.3 cw(c53.3,65.45) 54.15,65.45 54.15,59.133 ccw(c57.127,59.133) 55.022,57.028 55.25,56.8 cw(c53.936,55.486) 55.794,55.486 55.794,53.3 55.8,53.3 ccw(c56.275,53.3) 56.275,52.825 DD2.2
FSOUT1: DD2.3 DD3.9 | length 20.1
  Top Layer w0.254: DD3.9 49.85,65.055 ccw(c49.85,64.505) 49.3,64.505 49.3,63.15 ccw(c49.85,63.15) 49.85,62.6 53,62.6 cw(c53,62) 53.6,62 53.6,59.021 ccw(c56.79,59.021) 54.534,56.766 cw(c53.169,55.4) 55.1,55.4 55.1,53.35 ccw(c56.275,53.35) 56.275,52.175 DD2.3
GND: C1.1 C2.2 C4.1 C5.2 C6.2 C7.2 C8.1 C9.2 C10.1 C11.1 C12.2 C13.2 C14.1 C15.2 C16.1 C17.2 C18.2 DA1.1 DD1.7 DD2.6 DD2.19 DD2.23 DD3.1 DD3.3 DD3.5 DD3.7 DD3.10 DD3.19 DD4.1 DD4.3 DD4.5 DD4.7 DD4.10 DD4.19 HL1.2 HL2.2 HL3.2 HL4.2 HL5.2 HL6.2 R1.1 R5.1 S1.9 VD1.2 XP1.3 XP1.4 XP2.2 XP3.2 XP3.4 XP3.6 XP3.8 XP4.5 | length 95
  Top Layer w0.254: XP2.2 33,39 R1.1 ; DD1.7 39.5,38.21 v1(39.5,36.5) R5.1@41.25,36.5 ; R5.1 R5.1@41.25,36.5 ; R5.1@41.25,36.56 R5.1@41.25,36.5 ; C8.1 v1(52.2,44) C10.1 C10.1@53.5,44 ; DD3.7 DD3.7@51.829,67.595 ; v1(51.25,51.75) C9.2 ; v1(55,50.25) 55,50.225 DD2.6 ; v1(62.7,72.7) 62.7,73.729 cw(c62.871,73.729) C17.2 ; DD2.19 v1@64.721,47.625 ; DD2.23 v1@64.721,50.225 ; S1.9 cw(c63.645,38.62) 63.6,38.62 63.6,39.7 cw(c64.5,39.7) 64.5,40.6 72.776,40.6 ccw(c72.776,41.624) 73.5,40.9 cw(c74.466,39.934) 74.466,41.3 74.7,41.3 ccw(c74.7,42.35) C2.2 ; C13.2 v1(66.5,54.2) ; C15.2@74.675,52.175 C15.2
  Top Layer w0.3: 31.336,64.4 31.336,64.405 ; C7.2@47.5,54.146 cw(c48.354,54.146) C7.2 ; DD3.10 v1@52.715,63.785 ; DD3.7 v1@52.715,67.595 ; DD3.5 v1@52.715,70.135 ; DD3.3 v1@52.715,72.675 ; DD3.1 v1@52.715,75.215 ; DD3.19 62.655,73.945 cw(c62.655,73.85) C17.2 ; DD4.10 67.215,63.785 cw(c67.215,63.75) v1(67.25,63.75) ; DD4.7 v1@67.215,67.595 ; DD4.5 v1@67.215,70.135 ; DD4.3 v1@67.215,72.675 ; DD4.1 v1@67.215,75.215 ; v1(72.75,74) ccw(c72.883,74.133) 72.883,73.945 DD4.19 77.155,73.945 cw(c77.155,73.85) C18.2
  Top Layer w0.4: C11.1 31.3,65.7 cw(c31.3,65.25) v1(31.75,65.25) ; v1(36,31.5) 36,29.5 HL4.2
  Top Layer w0.5: C1.1 31.336,64.405 ; DA1.1@34.9,64.525 DA1.1 35.17,63.505 36.6,63.505 C4.1 ; HL3.2 v1(42,80.5) ; v1@42.975,44.1 v1(43,44.1) 44.302,44.1 cw(c44.302,44.032) C6.2 ; v1(47.5,52.134) C7.2@47.5,54.146 ; HL6.2 v1(50.5,80.5) ; HL2.2 v1(59,80.5) ; v1(63.6,37.1) 63.6,38.53 cw(c63.645,38.53) S1.9 ; HL5.2 v1(67.5,80.5) ; C14.1 v1@71,49 ; C16.1 v1@71.4,46.6 ; v1@72.5,52.175 C15.2@74.675,52.175 ; HL1.2 v1@75.5,78.875
  Top Layer w1: 30.6,54 cw(c30.65,54) 30.65,54.05 VD1.2
  Mid-Top Layer w0.254: 62.8,47.5 cw(c62.9,47.5) 62.9,47.6 v1(64.75,47.6)
  other v1: 71.5,46.6 71.1,49 64.75,50.25 39,51.5 43.5,51.5 72.5,52.2 31.75,63.75 33.25,63.75 52.75,63.75 33.25,65.25 67.25,67.55 52.75,67.61 67.25,70.1 52.75,70.15 52.75,72.65 67.25,72.65 52.75,75.2 67.25,75.2 75.5,78.85
LRCKO: DD2.10 R10.1 | length 20.9
  Top Layer w0.254: DD2.10 58.075,47.625 ccw(c58.075,48.156) 58.451,47.781 58.809,48.139 ; 58.809,48.139 ccw(c58.348,48.6) 59,48.6 59,54.276 cw(c60.024,54.276) 59.3,55 59.305,55.005 ccw(c58.11,56.2) 59.8,56.2 59.8,58.8 cw(c60.5,58.8) 60.5,59.5 65.75,59.5 cw(c65.75,59) 66.25,59 R10.1
LRCKO#: R15.2 XP3.5 | length 2.5
  Bottom Layer w0.5: R15.2 XP3.5
NetC2_1: C2.1 DD1.1 R2.1 R3.1 | length 67.1
  Top Layer w0.254: v1@37.8,42.11 DD1.1 ; R2.1 R3.1 ccw(c72.44,38.34) 72.44,37.9 74.85,37.9 cw(c74.85,37) C2.1@75.75,37 ; C2.1 C2.1@75.75,37 ; v1(75.75,39.5) C2.1@75.75,37
  Bottom Layer w0.254: v1@37.8,42.11 37.8,36.5 ccw(c40.05,36.5) 40.05,34.25 49.158,34.25 cw(c49.158,31.71) 50.954,33.506 51.216,33.244 ccw(c53.012,35.04) 53.012,32.5 61.85,32.5 ccw(c61.85,34.25) 63.6,34.25 63.6,34.393 ccw(c61.893,34.393) 63.1,35.6 62.936,35.764 cw(c64.473,37.3) 62.3,37.3 62.3,38.756 cw(c64,38.756) 64,40.456 73.742,40.456 cw(c73.742,37.916) 75.538,39.712 v1(75.75,39.5)
  other v1: 37.8,42.1
NetC3_1: C3.1 R1.2 XP2.1 | length 6
  Top Layer w0.254: XP2.1 30,41.66 R1.2 33.6,41.66 C3.1
NetC3_2: C3.2 DD1.5 R4.1 | length 7.5
  Top Layer w0.254: C3.2 35.4,41.66 R4.1 38.7,39.51 DD1.5
NetC4_2: C4.2 C5.1 DA1.3 L1.2 | length 13.9
  Top Layer w0.5: L1.2 39.75,61.5 39.75,60 cw(c39,60) C5.1 ; C4.2 38.4,63.505 DA1.3@39.75,63.505 ; C5.1@39.75,59.95 DA1.3@39.75,63.505 ; DA1.3 DA1.3@39.75,63.505
NetC6_1: C6.1 DD1.14 L2.1 | length 10.7
  Top Layer w0.254: L2.1@39.5,45.75 45.6,45.75 cw(c45.6,45.2) 46.15,45.2 C6.1 46.15,42.11 DD1.14
NetC8_2: C8.2 R6.1 ZQ1.1 | length 6.3
  Top Layer w0.254: C8.2@49.75,44 49.75,46.5 ZQ1.1 50.5,46.5 cw(c51.104,47.104) 50.25,47.104 R6.1
NetC14_2: C14.2 DD2.22 R7.1 | length 6.5
  Top Layer w0.254: DD2.22 63.753,49.575 cw(c63.753,48.919) 64.217,49.383 ccw(c64.9,50.066) 64.9,49.1 66.359,49.1 cw(c66.359,48.759) C14.2 66.6,46.8 R7.1
NetC16_2: C16.2 R7.2 | length 2.9
  Top Layer w0.3: R7.2 69.7,43.8 C16.2
NetC17_1: C17.1 DD3.20 L5.2 | length 5.2
  Top Layer w0.3: L5.2 59.9,77.2 59.9,75.215 DD3.20 61.9,75.3 C17.1
NetC18_1: C18.1 DD4.20 L6.2 | length 5
  Top Layer w0.3: L6.2 74.34,75.215 DD4.20 76.2,75.215 C18.1
NetDD1_2: DD1.2 DD1.3 | length 3.2
  Top Layer w0.254: DD1.3 38.7,40.81 38.7,41.46 DD1.2
NetDD1_6: DD1.6 DD1.9 R4.2 R5.2 | length 12.9
  Top Layer w0.254: R4.2 35.95,38.86 DD1.6 44.1,38.86 ; R5.2 44.1,36.06 44.1,38.86 ; DD1.9 44.1,38.86
NetDD1_10: DD1.10 DD1.13 | length 4.8
  Top Layer w0.254: DD1.10 44.1,39.51 44.1,41.46 DD1.13
NetDD1_12: DD1.12 S1.6 | length 27.3
  Top Layer w0.254: DD1.12 46.75,40.81 ccw(c46.75,41.558) 47.279,41.029 47.319,41.069 ccw(c46.277,42.11) v1@47.75,42.11 ; S1.6 61.1,32.425 61.1,33.75 cw(c61.6,33.75) 61.6,34.25 v1(62.25,34.25)
  Bottom Layer w0.254: v1(47.75,42) 48.75,42 50.46,42.11 cw(c50.46,39.57) 53,39.57 53,35.75 ccw(c55.5,35.75) 55.5,33.25 60.198,33.25 ccw(c60.198,35.79) 61.994,33.994 v1(62.25,34.25)
NetDD3_11: DD3.11 R23.1 | length 37.9
  Top Layer w0.3: v1@56.494,63.5 58.1,63.785 DD3.11
  Bottom Layer w0.3: R23.1@39.5,79.75 R23.1 39.5,81.75 cw(c40,81.75) 40,82.25 45.75,82.25 cw(c45.75,81.548) 46.452,81.548 46.452,79.595 ccw(c47.297,79.595) 47.297,78.75 49.095,78.75 cw(c49.095,77.47) 50,78.375 51.321,77.054 ccw(c52.9,78.633) 52.9,76.4 cw(c52.9,75.05) 54.25,75.05 54.25,66.796 ccw(c56.79,66.796) 54.994,65 v1@56.494,63.5
  other v1: 56.5,63.5
NetDD3_12: DD3.12 R22.1 | length 24
  Top Layer w0.3: v1@57.5,65.055 DD3.12
  Bottom Layer w0.3: R22.1 48,79.75 48.824,79.75 cw(c48.824,76.91) 50.832,78.918 51.97,77.78 ccw(c53.25,79.061) 53.25,77.25 cw(c53.25,75.5) 55,75.5 55,68.607 ccw(c57.54,68.607) 55.744,66.811 v1@57.5,65.055
  other v1: 57.5,65.1
NetDD3_14: DD3.14 R21.1 | length 16.9
  Top Layer w0.3: v1@57.5,67.595 DD3.14
  Bottom Layer w0.3: R21.1 cw(c55.896,79.896) 56.75,79.896 56.75,76.957 cw(c55.043,76.957) 56.25,75.75 ccw(c57.457,74.543) 55.75,74.543 55.75,70.397 ccw(c58.29,70.397) 56.494,68.601 v1@57.5,67.595
  other v1: 57.5,67.6
NetDD3_16: DD3.16 R20.1 | length 19.4
  Top Layer w0.3: v1(57.5,70) 59.231,70.135 DD3.16 DD3.16@60.365,70
  Bottom Layer w0.3: v1(57.5,70) 57.244,70.256 cw(c59.04,72.052) 56.5,72.052 56.5,72.75 cw(c58.069,72.75) 56.96,73.86 58.279,75.179 cw(c63.883,69.575) 63.883,77.5 64.4,77.5 ccw(c64.4,78.1) 65,78.1 R20.1
NetDD3_18: DD3.18 R19.1 | length 23.6
  Top Layer w0.3: v1(57.5,72.75) ccw(c57.575,72.75) 57.575,72.675 DD3.18
  Bottom Layer w0.3: v1(57.5,72.75) 59.869,75.119 cw(c64.169,70.818) 64.169,76.9 72.65,76.9 ccw(c72.65,77.5) 73.25,77.5 R19.1
NetDD4_2: DD4.2 R8.2 | length 18.9
  Top Layer w0.254: R8.2 57.25,62 cw(c58,62) 58,62.75 61.25,62.75 ccw(c61.25,63.75) 62.25,63.75 62.25,68.998 cw(c64.79,68.998) 62.994,70.794 63.156,70.956 ccw(c61.36,72.752) 63.9,72.752 63.9,72.905 cw(c65.095,72.905) 64.25,73.75 cw(c64.721,73.279) 64.721,73.945 DD4.2
NetDD4_4: DD4.4 R9.2 | length 12.4
  Top Layer w0.254: R9.2@61.97,61.22 R9.2 62.25,61 62.25,61.896 cw(c63.104,61.896) 62.5,62.5 ccw(c61.293,63.707) 63,63.707 63,68.539 cw(c65.54,68.539) 63.744,70.335 64.675,71.266 cw(c65.01,70.931) DD4.4@65.01,71.405
  Top Layer w0.3: DD4.4@64.795,71.405 DD4.4@65.01,71.405
NetDD4_6: DD4.6 R10.2 | length 11.2
  Top Layer w0.254: DD4.6 64.565,68.865 ccw(c64.565,68.05) 63.75,68.05 63.75,62.35 ccw(c64.75,62.35) 64.75,61.35 65.9,61.35 cw(c65.9,61) R10.2
NetDD4_8: DD4.8 R11.2 | length 9.1
  Top Layer w0.254: DD4.8 66.873,66.325 cw(c66.873,63.785) 68.669,65.581 69.266,64.984 cw(c67.47,63.188) 70.01,63.188 70.01,61 R11.2
NetDD4_9: DD4.9 R12.2 | length 15.7
  Top Layer w0.254: DD4.9 67.215,65.055 cw(c67.215,63.77) 68.5,63.77 68.5,60.25 ccw(c69.25,60.25) 69.25,59.5 74.75,59.5 ccw(c74.75,60) 75.25,60 R12.2
NetDD4_11: DD4.11 R17.1 | length 21.1
  Top Layer w0.3: DD4.11 76.665,63.785 cw(c76.665,62.55) 77.9,62.55 v1(77.9,50.4)
  Bottom Layer w0.3: R17.1 74.5,51.1 ccw(c75.2,51.1) 75.2,50.4 v1(77.9,50.4)
NetDD4_12: DD4.12 R16.1 | length 10.1
  Top Layer w0.254: v1@72.75,65.055 DD4.12
  Bottom Layer w0.3: v1@72.75,65.055 72.75,62.802 ccw(c75.29,62.802) 73.494,61.006 73.756,60.744 cw(c71.96,58.948) 74.5,58.948 R16.1
  other v1: 72.75,65.1
NetDD4_14: DD4.14 R15.1 | length 7.6
  Top Layer w0.254: v1@72.75,67.595 DD4.14
  Bottom Layer w0.3: v1@72.75,67.595 72.75,67.104 ccw(c73.604,67.104) 73,66.5 73.587,65.913 cw(c72.347,64.674) 74.1,64.674 74.1,63.806 ccw(c75.466,63.806) R15.1
  other v1: 72.75,67.6
NetDD4_16: DD4.16 R14.1 | length 6
  Top Layer w0.254: v1@72.75,70.135 DD4.16
  Bottom Layer w0.3: v1@72.75,70.135 73.965,70.135 cw(c73.965,69.6) 74.5,69.6 R14.1
  other v1: 72.75,70.1
NetDD4_18: DD4.18 R13.1 | length 6.8
  Top Layer w0.254: v1@71.4,72.675 DD4.18
  Bottom Layer w0.3: v1@71.4,72.675 74.175,72.675 R13.1
  other v1: 71.4,72.65
NetHL1_1: HL1.1 R19.2 | length 4.7
  Top Layer w0.5: v1@68.5,78.875 HL1.1
  Bottom Layer w0.3: v1@68.5,78.875 R19.2@70.394,80.31
  other v1: 68.5,78.85
NetHL2_1: HL2.1 R21.2 | length 4.4
  Top Layer w0.5: v1@53.125,78.375 HL2.1
  Bottom Layer w0.3: v1@53.125,78.375 53.125,79.595 cw(c54.405,79.595) R21.2
  other v1: 53.2,78.4
NetHL3_1: HL3.1 R23.2 | length 3.5
  Top Layer w0.5: v1@36.131,78.75 HL3.1@36.131,80.5
  Bottom Layer w0.3: v1@36.131,78.75 R23.2@36.131,80.5
  other v1: 36.15,78.75
NetHL4_1: HL4.1 R18.2 | length 2.6
  Top Layer w0.4: HL4.1 R18.2
NetHL5_1: HL5.1 R20.2 | length 4
  Top Layer w0.5: v1@61.625,78.6 HL5.1
  Bottom Layer w0.3: v1@61.625,78.6 R20.2@61.625,80.125
  Bottom Layer w0.5: R20.2@61.625,80.125 cw(c62,80.125) R20.2
  other v1: 61.65,78.6
NetHL6_1: HL6.1 R22.2 | length 3.9
  Top Layer w0.5: v1@44.625,78.75 HL6.1
  Bottom Layer w0.3: v1@44.625,78.75 44.625,80.5 R22.2
  other v1: 44.65,78.75
NetR2_2: R2.2 S1.8 VD2.1 VD3.1 | length 16.6
  Top Layer w0.254: VD2.1 66.55,31.7 ; R2.2 64.629,35.34 ccw(c64.629,34.356) 63.645,34.356 S1.8 64.8,32.425 66.55,31.7 ; VD3.1 71.25,31.5 ccw(c71,31.5) 71,31.75 66.5,31.75 cw(c66.5,31.7) 66.55,31.7
PSCK0: DD2.13 S1.13 | length 11.2
  Top Layer w0.254: DD2.13 58.075,45.675 cw(c58.075,45.35) 58.4,45.35 v1(58.4,43.3) ; v1(58.4,37.1) 58.4,38.177 cw(c58.963,38.177) S1.13
  Mid-Bot Layer w0.4: v1(58.4,37.1) v1(58.4,43.3)
PSCK1: DD2.14 S1.14 | length 12.2
  Top Layer w0.254: DD2.14 57.3,45.025 v1(57.3,42) ; S1.14 57.3,38.575 v1(57.3,35.8)
  Mid-Bot Layer w0.4: v1(57.3,35.8) v1(57.3,42)
PWR-IN: C1.2 L1.1 VD1.1 XP1.1 XP1.2 | length 9.2
  Top Layer w0.5: XP1.1 C1.2 ; L1.1@33.1,61.5 L1.1 33.26,59.69 ccw(c34,59.69) VD1.1
  Top Layer w1: 30.3,58.9 cw(c30.35,58.9) 30.35,58.95 VD1.1
R\S\T\: DD1.4 DD2.21 | length 30.7
  Top Layer w0.254: DD1.4 41,40.16 v1(42,40.1) ; v1@49.85,41 58.45,41 ccw(c58.45,42) 59.45,42 59.45,45.249 cw(c61.769,45.249) 60.129,46.889 ccw(c58.118,48.528) 60.5,47.5 60.799,48.201 cw(c61.987,47.594) 61.9,48.925 DD2.21
  Bottom Layer w0.254: v1@42.096,40.256 42,40.16 44.157,40.16 cw(c44.157,37.907) 45.75,39.5 45.756,39.494 ccw(c47.552,41.29) 47.552,38.75 47.6,38.75 ccw(c47.6,41) v1@49.85,41
  other v1: 49.8,41
RXIN: DD1.8 DD2.20 | length 24.2
  Top Layer w0.254: DD1.8 48.184,38.21 ccw(c48.184,40.566) 49.85,38.9 50.306,39.356 cw(c52.102,37.56) 52.102,40.1 58.4,40.1 ccw(c58.4,42.2) 60.5,42.2 60.5,45.5 60.6,46.185 61.112,47.393 61.505,48.106 61.6,48.201 cw(c61.78,48.021) 61.78,48.275 DD2.20
SCKO: DD2.4 R8.1 | length 8.4
  Top Layer w0.254: DD2.4 58.075,51.525 ccw(c58.075,51.9) 58.45,51.9 58.45,53.475 ccw(c57.303,53.475) 58.114,54.286 cw(c59.114,55.286) 57.7,55.286 57.7,58 R8.1 ccw(c57.371,57.879) R8.1@57.2,57.879
SCKO#: R13.2 XP3.1 | length 2.5
  Bottom Layer w0.5: R13.2 XP3.1
UOUT: DD2.16 XP4.3 | length 20.6
  Top Layer w0.254: DD2.16 63.678,45.675 cw(c63.678,45.078) 64.1,45.5 64.3,45.2 v1(64.2,43.3)
  Bottom Layer w0.254: v1(64.2,43.3) 64.2,42.471 ccw(c64.871,42.471) 64.871,41.8 79.88,41.8 ccw(c79.88,41.92) XP4.3
XTI: C10.2 DD2.8 ZQ1.2 | length 7.3
  Top Layer w0.254: ZQ1.2@54.1,46.5 ZQ1.2@54.15,46.55 ; C10.2@54.65,44 54.65,46.5 ZQ1.2 54.578,46.878 ccw(c53.656,47.8) 54.96,47.8 cw(c55.346,47.8) 55.073,48.073 55.1,48.1 55.794,48.706 cw(c56.324,48.176) 56.324,48.925 DD2.8
XTO: DD2.7 R6.2 | length 4.6
  Top Layer w0.254: R6.2 53.25,49 54.896,49 ccw(c54.896,49.854) 55.5,49.25 cw(c56.285,48.465) 56.285,49.575 DD2.7
pads on no net: DD3.13 DD3.15 DD3.17 DD4.13 DD4.15 DD4.17 S1.7 S1.10 VD2.2 VD3.2
copper on no net: | length 0.9
  Top Layer w0.254: 57.291,54.2 ccw(c57.15,54.2) 57.291,54.2

## Polygon pours and split planes (outlines as drawn)
GND on Mid-Top Layer "GND_L02_P012" (solid, remove dead copper, pour order 12): 84,75.75 65,75.75 ccw(c65,75.5) 64.75,75.5 64.75,72.75 cw(c62.75,72.75) 62.75,70.75 55.75,70.75 ccw(c55.75,70.5) 55.5,70.5 55.5,61 cw(c53.5,61) 53.5,59 51,59 51,56.75 42,56.75 42,26 73.25,26 73.25,41.5 ccw(c72.75,41.5) 72.75,42 62.5,42 cw(c62.5,43.25) 61.25,43.25 61.25,43.5 cw(c62.5,43.5) 62.5,44.75 ccw(c62.5,45.75) 63.5,45.75 63.5,52.948 cw(c66.04,52.948) 64.244,54.744 65.256,55.756 cw(c67.052,53.96) 67.052,56.5 68.5,56.5 cw(c68.5,55.25) 69.75,55.25 ccw(c70,55.25) 70,55 72.5,55 cw(c72.5,53.5) 74,53.5 74,26 84,26
GND on Mid-Top Layer "GND_L02_P010" (solid, remove dead copper, pour order 10): 26,69 26,84 84,84 84,76.75 64.75,76.75 ccw(c64.75,75.75) 63.75,75.75 63.75,72.75 cw(c62.75,72.75) 62.75,71.75 55.5,71.75 ccw(c55.5,70.75) 54.5,70.75 54.5,61 cw(c53.5,61) 53.5,60 50.5,60 ccw(c50.5,59.25) 49.75,59.25 ccw(c50.5,59.25) 50.5,58.5 54.5,58.5 54.5,56.75 42,56.75 42,63 ccw(c44,63) 44,61 46,61 ccw(c46,63) 48,63 48,75 ccw(c46,75) 46,77 31,77 ccw(c31,75) 29,75 29,69
GND on Mid-Top Layer "GND_L02_P008" (solid, remove dead copper, pour order 8): 30.675,66.25
GND on Mid-Top Layer "GND_L02_P006" (solid, remove dead copper, pour order 6): 42,66.75 ccw(c41.75,66.75) 41.75,67 31,67 cw(c31,69) 29,69 26,69 26,26 42,26
GND on Mid-Top Layer "GND_L02_P004" (solid, remove dead copper, pour order 4): 42.5,65
GND on Bottom Layer "GND_L04_P018" (solid, remove dead copper, pour order 18): 53.1,59 26,59 26,26 53.1,26
GND on Bottom Layer "GND_L04_P014" (solid, remove dead copper, pour order 14): 84,75.75 65,75.75 ccw(c65,75.5) 64.75,75.5 64.75,72.75 cw(c62.75,72.75) 62.75,70.75 55.75,70.75 ccw(c55.75,70.5) 55.5,70.5 55.5,61 cw(c53.5,61) 53.5,59 51,59 51,56.75 51,26 73.25,26 73.25,41.5 ccw(c72.75,41.5) 72.75,42 62.5,42 cw(c62.5,43.25) 61.25,43.25 61.25,43.5 cw(c62.5,43.5) 62.5,44.75 ccw(c62.5,45.75) 63.5,45.75 63.5,52.948 cw(c66.04,52.948) 64.244,54.744 65.256,55.756 cw(c67.052,53.96) 67.052,56.5 68.5,56.5 cw(c68.5,55.25) 69.75,55.25 ccw(c70,55.25) 70,55 72.5,55 cw(c72.5,53.5) 74,53.5 74,26 84,26